# EAGLE board OSSI-1 COMMS Tshirts (EAGLE 6.5.0), part 1 of 2
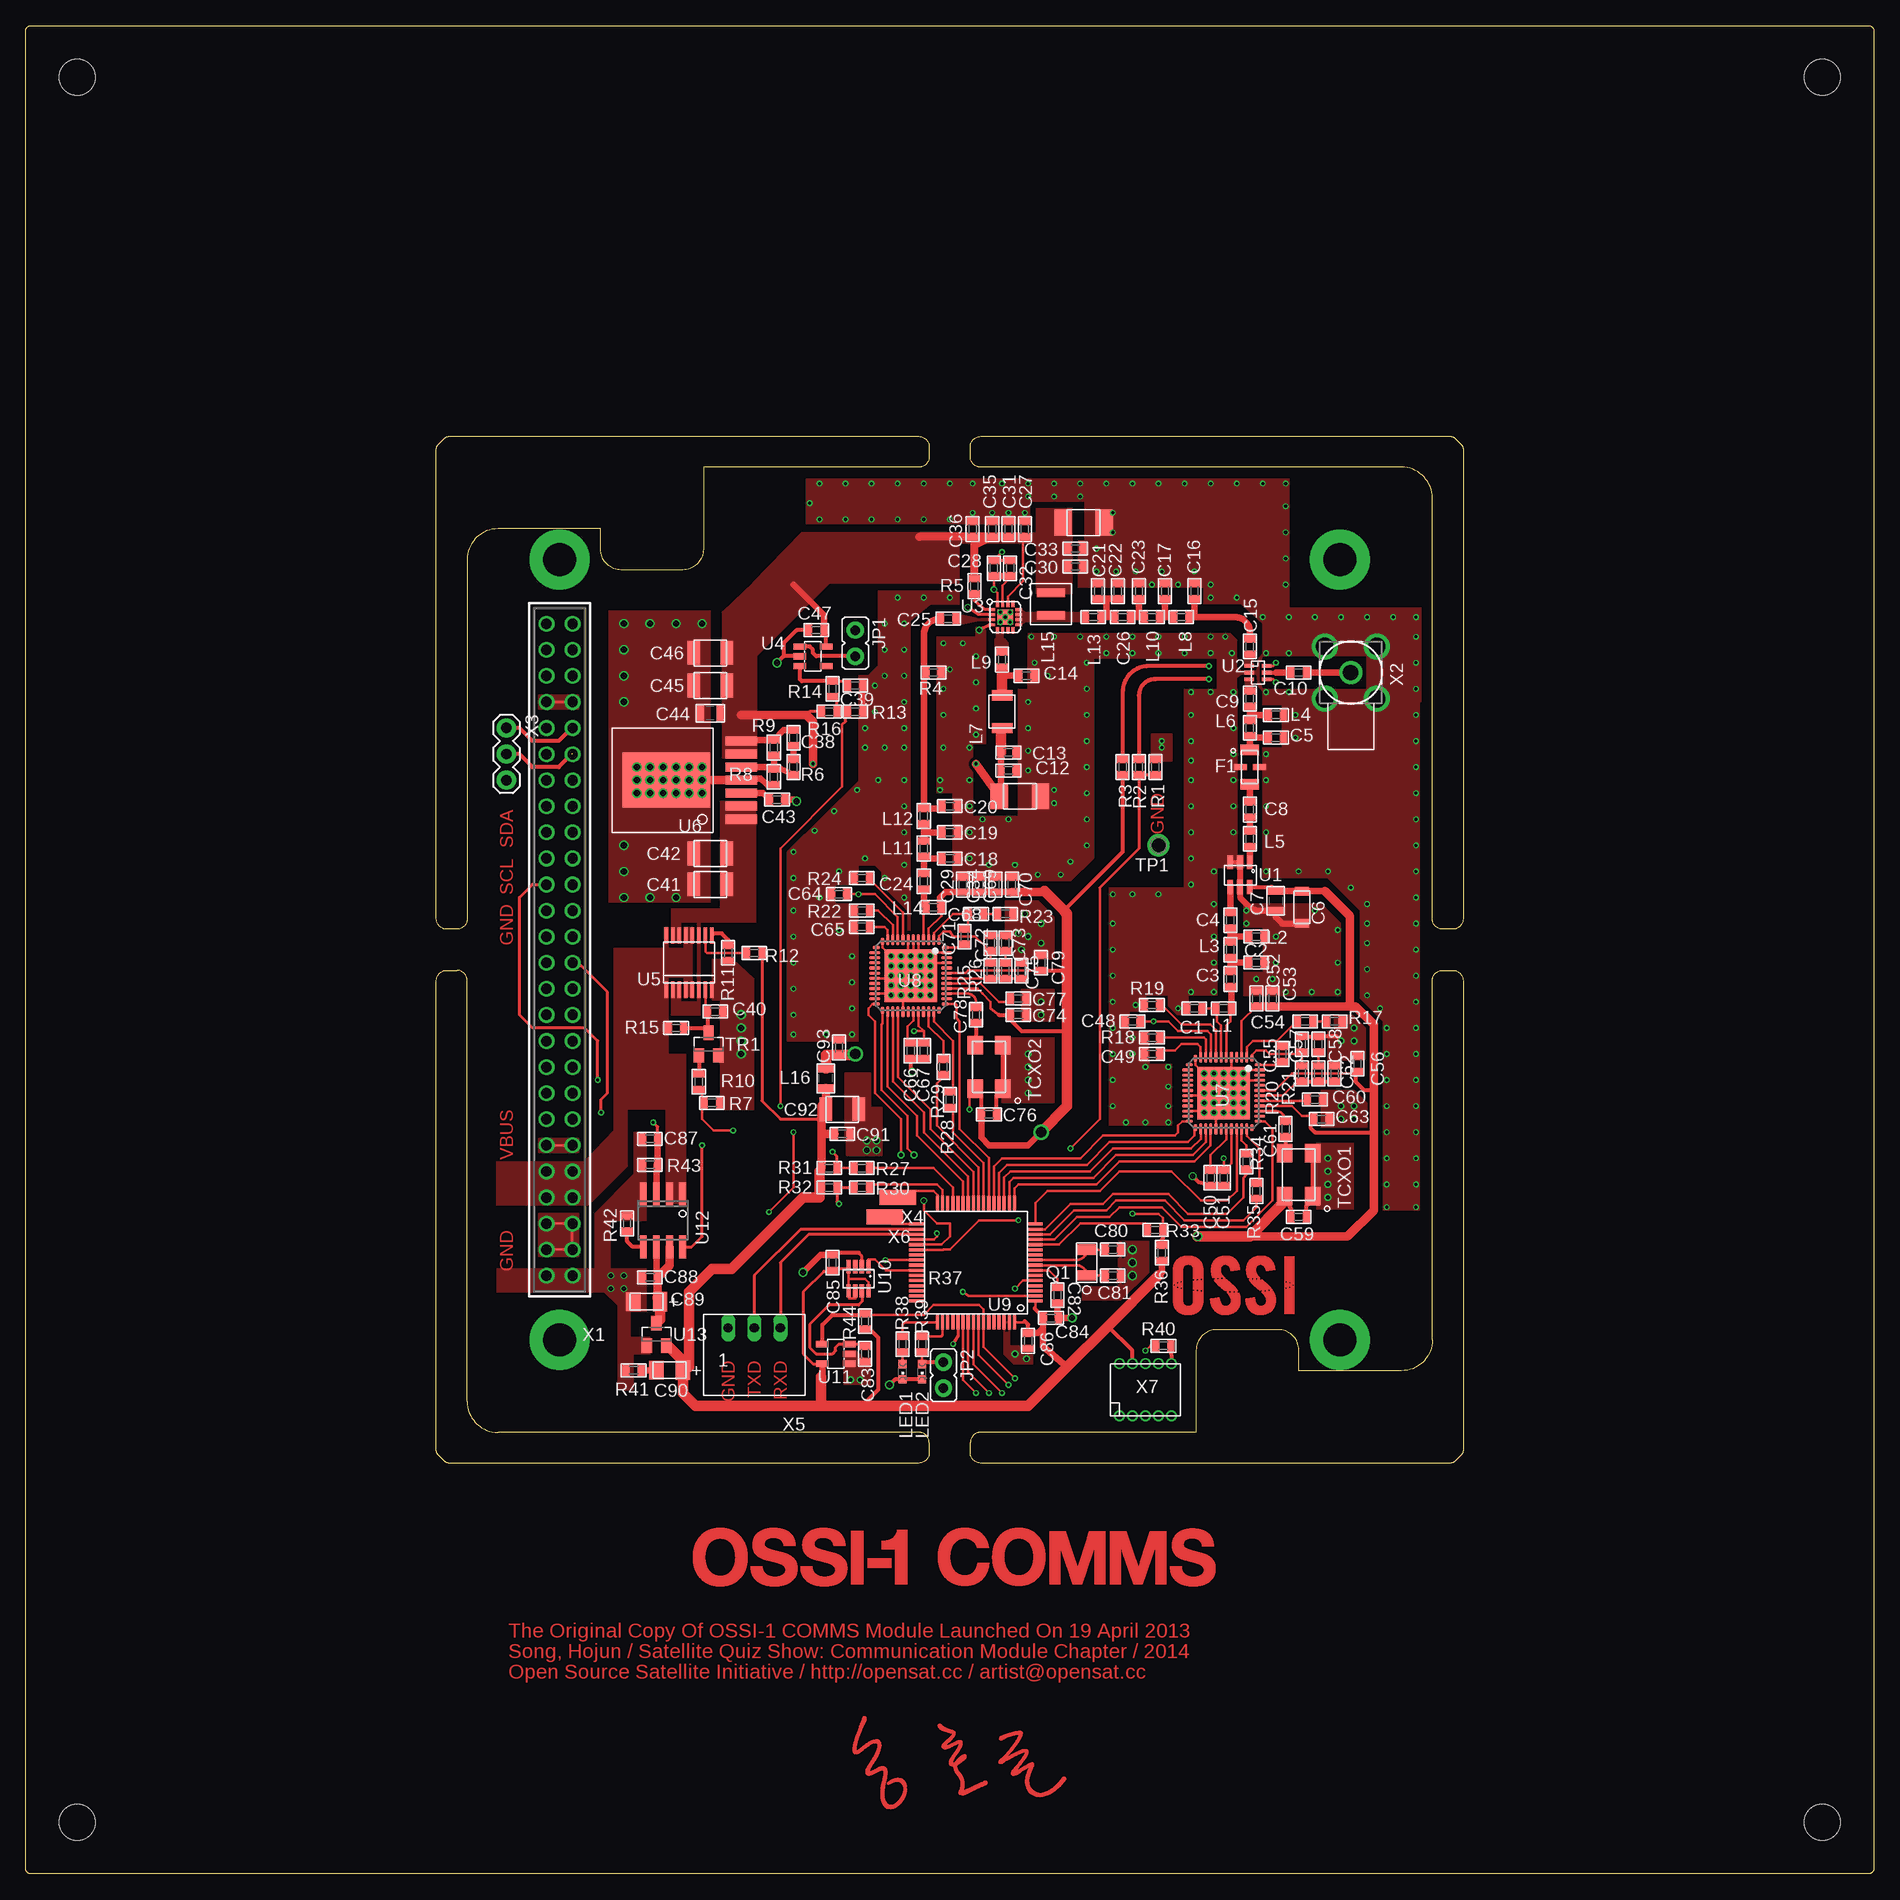
[diagram p0: board, top side]
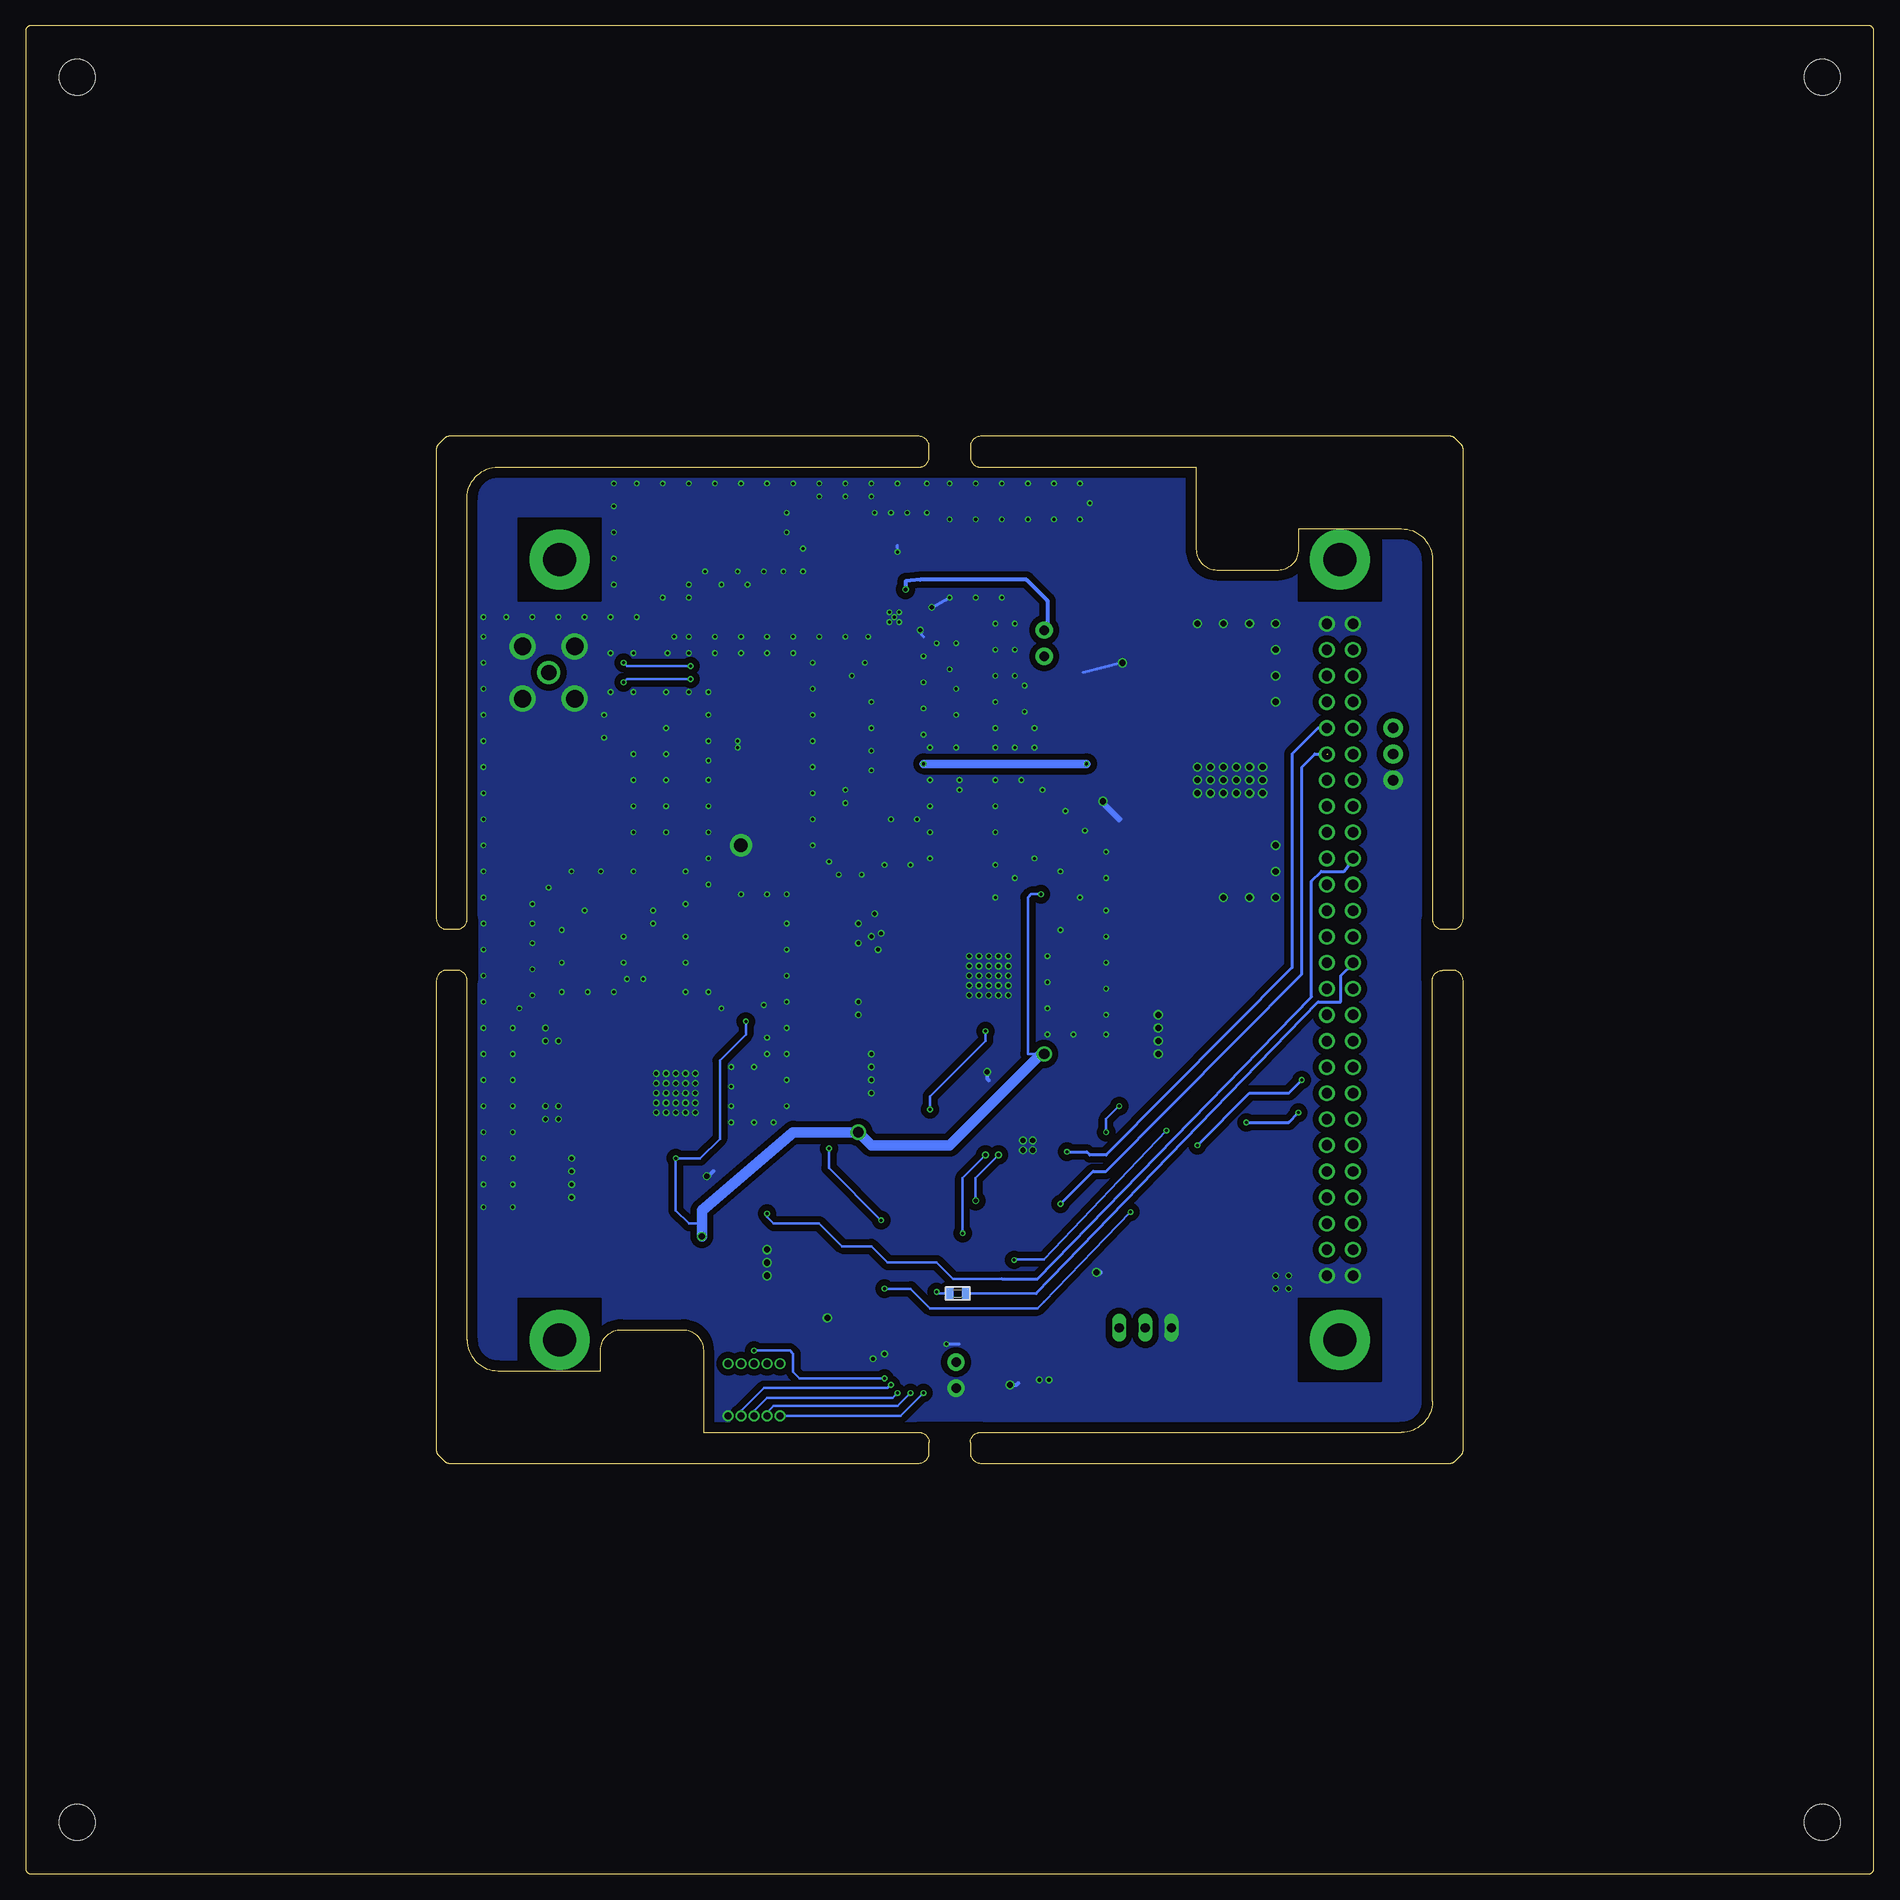
[diagram p1: board, bottom side, seen from below]

Size 180 x 180 mm. Coordinates in mm from the lower left corner, seen from the top.
Outline: 93,140 138.79,140 arc-45 139.15,139.85 139.85,139.15 arc-45 140,138.79 140,93 arc-90 139,92 138,92 arc-90 137,93 137,134 arc90 134,137 93,137 arc-90 92,138 92,139 arc-90 93,140
Outline: 137,52 137,87 arc-90 138,88 139,88 arc-90 140,87 140,41.21 arc-45 139.85,40.85 139.15,40.15 arc-45 138.79,40 93,40 arc-90 92,41 92,42 arc-90 93,43 114,43 114,51 arc-90 116,53 122,53 arc-90 124,51 124,49 134,49 arc90 137,52
Outline: 88,139 88,138 arc-90 87,137 66,137 66,129 arc-90 64,127 58,127 arc-90 56,129 56,131 46,131 arc90 43,128 43,93 arc-90 42,92 41,92 arc-90 40,93 40,138.79 arc-45 40.15,139.15 40.85,139.85 arc-45 41.21,140 87,140 arc-90 88,139
Outline: 43,46 43,87 arc90 42,88 41,88 arc90 40,87 40,41.21 arc45 40.15,40.85 40.85,40.15 arc45 41.21,40 87,40 arc90 88,41 88,42 arc90 87,43 46,43 arc-90 43,46
Outline: 179.5,0 0.5,0 arc-90 0,0.5 0,179.5 arc-90 0.5,180 179.5,180 arc-90 180,179.5 180,0.5 arc-90 179.5,0
Copper layers (1*16): Top 0.035mm / dielectric 1.5mm / Bottom 0.035mm
Design rules "default": minimum track width 10mil, minimum drill 5mil, track to track 8mil, track to pad 8mil, pad to pad 8mil, via to via 8mil, smd to smd 8mil, copper to edge 40mil, drill to drill 8mil, minimum pad ring 5mil, minimum via ring 5mil, stop-mask expansion 4mil, vias tented up to drill 0mil, thermal gap 10mil
Holes 3.5 mm at 5,175 175,175 175,5 5,5

## Footprints (pad centres in the part's own frame; a part is rotated, then mirrored left to right if it is on the bottom)
C0603(1608) = smd 0.7 x 1.1: 1 -0.75,0; 2 0.75,0
C1206-GCM31 = smd 0.8 x 1.4: P$1 -1.55,0; P$2 1.55,0
C0805(2012) = smd 0.7 x 1.5: 1 -0.95,0; 2 0.95,0
C1210-TMK325 = smd 1.7 x 2.5: P$1 -2,0; P$2 2,0
C1210-GCM32 = smd 1.2 x 2.3: P$1 -1.6,0; P$2 1.6,0
C1206(3216)-A = smd 1.4 x 1.9: 1 -1.3,0 | smd 1.4 x 1.8: 2 1.3,0
LFCN = smd 1.045 x 1.8: 1 -1.675,0; 3 1.675,0 | smd 0.61 x 1.25: 2 0,-0.925; 4 0,0.925
3.2-PAD-ROUND = drill 3.2 pad 5.842: B3,2 0,0
JP1 = drill 0.914 pad 1.676: 1 0,-1.27; 2 0,1.27
L0603(1608) = smd 0.7 x 1.1: 1 -0.75,0; 2 0.75,0
LQH32CN331K23L = smd 1 x 2: P$1 -1.6,0; P$2 1.6,0
NR3012 = smd 0.8 x 2.7: P$1 -1.1,0; P$2 1.1,0
L0805(2012) = smd 0.7 x 1.5: 1 -0.95,0; 2 0.95,0
CHIPLED_0603 = smd 0.8 x 0.8: A 0,-0.75; C 0,0.75
NX-3215 = smd 1 x 1.8: 1 -1.25,0; 2 1.25,0
R0603(1608) = smd 0.7 x 1.1: 1 -0.75,0; 2 0.75,0
TCXO_M532 = smd 1.8 x 1.5: 1 -2.1,-1.35; 2 2.1,-1.35; 3 2.1,1.35; 4 -2.1,1.35
TP-13 = drill 1.321 pad 2.159: TP 0,0
SOT23 = smd 1 x 1.4: 1 -0.95,-1.1; 2 0.95,-1.1; 3 0,1.1
SOT23-6 = smd 0.56 x 1.33: 1 -0.95,-1.2; 2 0,-1.2; 3 0.95,-1.2; 4 0.95,1.2; 5 0,1.2; 6 -0.95,1.2
SC70-6 = smd 0.36 x 0.95: 1 -0.65,-0.85; 2 0,-0.85; 3 0.65,-0.85; 4 0.65,0.85; 5 0,0.85; 6 -0.65,0.85
RF5110G = smd 0.64 x 0.28: 1 -1.3,0.75; 2 -1.3,0.25; 3 -1.3,-0.25; 4 -1.3,-0.75; 9 1.3,-0.75; 10 1.3,-0.25; 11 1.3,0.25; 12 1.3,0.75 | smd 0.28 x 0.64: 5 -0.75,-1.3; 6 -0.25,-1.3; 7 0.25,-1.3; 8 0.75,-1.3; 13 0.75,1.3; 14 0.25,1.3; 15 -0.25,1.3; 16 -0.75,1.3 | smd 1.5 x 1.5: TPAD 0,0
SOT23-5DBV = smd 0.6 x 1.22: 1 -0.95,-1.3; 2 0,-1.3; 3 0.95,-1.3; 4 0.95,1.3; 5 -0.95,1.3
16QSOP = smd 1.6 x 0.356: 1 -2.65,2.223; 2 -2.65,1.587; 3 -2.65,0.953; 4 -2.65,0.318; 5 -2.65,-0.318; 6 -2.65,-0.953; 7 -2.65,-1.587; 8 -2.65,-2.223; 9 2.65,-2.223; 10 2.65,-1.587; 11 2.65,-0.953; 12 2.65,-0.318; 13 2.65,0.318; 14 2.65,0.953; 15 2.65,1.587; 16 2.65,2.223
TO-PMOD-7 = smd 0.89 x 3.06: 1 -3.81,0; 2 -2.54,0; 3 -1.27,0; 4 0,0; 5 1.27,0; 6 2.54,0; 7 3.81,0 | smd 5.35 x 8.54: PAD 0,7.305
LFCSP48 = smd 0.7 x 0.32: 1 -3.375,2.75; 12 -3.375,-2.75; 25 3.375,-2.75; 36 3.375,2.75 | smd 1.1 x 0.32: 2 -3.5,2.25; 3 -3.5,1.75; 4 -3.5,1.25; 5 -3.5,0.75; 6 -3.5,0.25; 7 -3.5,-0.25; 8 -3.5,-0.75; 9 -3.5,-1.25; 10 -3.5,-1.75; 11 -3.5,-2.25; 26 3.5,-2.25; 27 3.5,-1.75; 28 3.5,-1.25; 29 3.5,-0.75; 30 3.5,-0.25; 31 3.5,0.25; 32 3.5,0.75; 33 3.5,1.25; 34 3.5,1.75; 35 3.5,2.25 | smd 0.32 x 0.7: 13 -2.75,-3.375; 24 2.75,-3.375; 37 2.75,3.375; 48 -2.75,3.375 | smd 0.32 x 1.1: 14 -2.25,-3.5; 15 -1.75,-3.5; 16 -1.25,-3.5; 17 -0.75,-3.5; 18 -0.25,-3.5; 19 0.25,-3.5; 20 0.75,-3.5; 21 1.25,-3.5; 22 1.75,-3.5; 23 2.25,-3.5; 38 2.25,3.5; 39 1.75,3.5; 40 1.25,3.5; 41 0.75,3.5; 42 0.25,3.5; 43 -0.25,3.5; 44 -0.75,3.5; 45 -1.25,3.5; 46 -1.75,3.5; 47 -2.25,3.5 | smd 5.1 x 5.1: EXP 0,0
PM/PAG64 = smd 1.4 x 0.3: 1 -5.8,3.75; 2 -5.8,3.25; 3 -5.8,2.75; 4 -5.8,2.25; 5 -5.8,1.75; 6 -5.8,1.25; 7 -5.8,0.75; 8 -5.8,0.25; 9 -5.8,-0.25; 10 -5.8,-0.75; 11 -5.8,-1.25; 12 -5.8,-1.75; 13 -5.8,-2.25; 14 -5.8,-2.75; 15 -5.8,-3.25; 16 -5.8,-3.75; 33 5.8,-3.75; 34 5.8,-3.25; 35 5.8,-2.75; 36 5.8,-2.25; 37 5.8,-1.75; 38 5.8,-1.25; 39 5.8,-0.75; 40 5.8,-0.25; 41 5.8,0.25; 42 5.8,0.75; 43 5.8,1.25; 44 5.8,1.75; 45 5.8,2.25; 46 5.8,2.75; 47 5.8,3.25; 48 5.8,3.75 | smd 0.3 x 1.4: 17 -3.75,-5.8; 18 -3.25,-5.8; 19 -2.75,-5.8; 20 -2.25,-5.8; 21 -1.75,-5.8; 22 -1.25,-5.8; 23 -0.75,-5.8; 24 -0.25,-5.8; 25 0.25,-5.8; 26 0.75,-5.8; 27 1.25,-5.8; 28 1.75,-5.8; 29 2.25,-5.8; 30 2.75,-5.8; 31 3.25,-5.8; 32 3.75,-5.8; 49 3.75,5.8; 50 3.25,5.8; 51 2.75,5.8; 52 2.25,5.8; 53 1.75,5.8; 54 1.25,5.8; 55 0.75,5.8; 56 0.25,5.8; 57 -0.25,5.8; 58 -0.75,5.8; 59 -1.25,5.8; 60 -1.75,5.8; 61 -2.25,5.8; 62 -2.75,5.8; 63 -3.25,5.8; 64 -3.75,5.8
SOT23-8 = smd 0.42 x 1.3: 1 -0.975,-1.175; 2 -0.325,-1.175; 3 0.325,-1.175; 4 0.975,-1.175; 5 0.975,1.175; 6 0.325,1.175; 7 -0.325,1.175; 8 -0.975,1.175
SO8 = smd 0.65 x 2.2: 1 -1.905,-2.6; 2 -0.635,-2.6; 3 0.635,-2.6; 4 1.905,-2.6; 5 1.905,2.6; 6 0.635,2.6; 7 -0.635,2.6; 8 -1.905,2.6
ESQ-126-XX-X-D = drill 1.016 pad 1.524: 1 -1.27,31.75; 2 1.27,31.75; 3 -1.27,29.21; 4 1.27,29.21; 5 -1.27,26.67; 6 1.27,26.67; 7 -1.27,24.13; 8 1.27,24.13; 9 -1.27,21.59; 10 1.27,21.59; 11 -1.27,19.05; 12 1.27,19.05; 13 -1.27,16.51; 14 1.27,16.51; 15 -1.27,13.97; 16 1.27,13.97; 17 -1.27,11.43; 18 1.27,11.43; 19 -1.27,8.89; 20 1.27,8.89; 21 -1.27,6.35; 22 1.27,6.35; 23 -1.27,3.81; 24 1.27,3.81; 25 -1.27,1.27; 26 1.27,1.27; 27 -1.27,-1.27; 28 1.27,-1.27; 29 -1.27,-3.81; 30 1.27,-3.81; 31 -1.27,-6.35; 32 1.27,-6.35; 33 -1.27,-8.89; 34 1.27,-8.89; 35 -1.27,-11.43; 36 1.27,-11.43; 37 -1.27,-13.97; 38 1.27,-13.97; 39 -1.27,-16.51; 40 1.27,-16.51; 41 -1.27,-19.05; 42 1.27,-19.05; 43 -1.27,-21.59; 44 1.27,-21.59; 45 -1.27,-24.13; 46 1.27,-24.13; 47 -1.27,-26.67; 48 1.27,-26.67; 49 -1.27,-29.21; 50 1.27,-29.21; 51 -1.27,-31.75; 52 1.27,-31.75
MCX-R/A = drill 1.5: 1 0,0 | drill 1.7: 2 -2.54,2.54; 3 2.54,2.54; 4 2.54,-2.54; 5 -2.54,-2.54
1X03 = drill 1.016 pad 1.88: 1 0,0; 2 2.54,0; 3 5.08,0
P-PAD-S = smd 3.556 x 1.5: 1 0,0
5268-03 = drill 0.9 long: 1 2.54,0; 2 0,0; 3 -2.54,0
M50-3200545 = drill 0.7 pad 1: 1 -2.54,-2.54; 2 -2.54,2.54; 3 -1.27,-2.54; 4 -1.27,2.54; 5 0,-2.54; 6 0,2.54; 7 1.27,-2.54; 8 1.27,2.54; 9 2.54,-2.54; 10 2.54,2.54

## Placement (x,y rotation side)
C1  6.8pF  [C0603(1608)]  113.82,84.3 180 top
C2  DNP  [C0603(1608)]  119.86,88.74 0 top
C3  13pF  [C0603(1608)]  117.31,87.15 90 top
C4  8.2pF  [C0603(1608)]  117.31,92.87 90 top
C5  DNP  [C0603(1608)]  121.76,110.65 0 top
C6  10uF  [C1206-GCM31]  124.3,94.14 270 top
C7  470pF 0805  [C0805(2012)]  121.76,94.77 270 top
C8  1000pF  [C0603(1608)]  119.22,103.66 90 top
C9  56pF  [C0603(1608)]  119.22,114.46 90 top
C10  56pF  [C0603(1608)]  123.98,117 180 top
C11  3.3uF  [C1210-TMK325]  96.84,104.93 0 top
C12  10pF  [C0603(1608)]  95.72,107.47 0 top
C13  1nF  [C0603(1608)]  95.72,109.22 0 top
C14  15pF  [C0603(1608)]  97.47,116.68 0 top
C15  56pF  [C0603(1608)]  119.22,119.54 90 top
C16  DNP  [C0603(1608)]  113.82,124.94 270 top
C17  DNP  [C0603(1608)]  110.97,124.94 270 top
C18  8.2pF  [C0603(1608)]  90.01,98.9 0 top
C19  12pF  [C0603(1608)]  90.01,101.44 0 top
C20  8.2pF  [C0603(1608)]  90.01,103.98 0 top
C21  10pF  [C0603(1608)]  104.46,124.94 90 top
C22  6pF  [C0603(1608)]  106.36,124.94 90 top
C23  DNP  [C0603(1608)]  108.42,124.94 270 top
C24  6pF  [C0603(1608)]  87.47,96.68 90 top
C25  56pF  [C0603(1608)]  89.85,122.24 0 top
C26  56pF  [C0603(1608)]  106.84,122.39 0 top
C27  330pF  [C0603(1608)]  97.31,130.97 90 top
C28  10nF  [C0603(1608)]  94.3,127.16 270 top
C29  100pF  [C0603(1608)]  91.28,96.36 90 top
C30  47pF  [C0603(1608)]  102.23,127.32 0 top
C31  1nF  [C0603(1608)]  95.72,130.97 90 top
C32  10nF  [C0603(1608)]  95.88,127.16 270 top
C33  1nF  [C0603(1608)]  102.23,129.06 0 top
C34  100nF  [C0603(1608)]  92.87,96.36 90 top
C35  10nF  [C0603(1608)]  94.14,130.97 90 top
C36  10nF  [C0603(1608)]  92.23,130.97 270 top
C37  3.3uF  [C1210-TMK325]  103.03,131.6 0 top
C38  180pF  [C0603(1608)]  74.77,110.65 270 top
C39  100nF  [C0603(1608)]  80.8,115.73 0 top
C40  100nF  [C0603(1608)]  67.15,83.98 0 top
C41  4.7uF  [C1210-GCM32]  66.67,96.36 180 top
C42  22uF,1210  [C1210-GCM32]  66.67,99.38 180 top
C43  10nF  [C0603(1608)]  73.18,104.61 0 top
C44  4.7uF,1210  [C0805(2012)]  66.67,113.03 180 top
C45  22uF  [C1210-GCM32]  66.67,115.73 180 top
C46  100uF  [C1210-GCM32]  66.67,118.9 180 top
C47  100nF  [C0603(1608)]  76.99,121.12 180 top
C48  100nF  [C0603(1608)]  107.79,83.03 180 top
C49  100nF  [C0603(1608)]  109.69,79.85 180 top
C50  100nF  [C0603(1608)]  115.41,67.78 270 top
C51  10nF  [C0603(1608)]  116.68,67.78 270 top
C52  100nF  [C0603(1608)]  119.86,85.25 90 top
C53  100pF  [C0603(1608)]  121.44,85.25 90 top
C54  100nF  [C0603(1608)]  124.62,83.03 0 top
C55  22nF  [C0603(1608)]  122.39,79.85 90 top
C56  10nF  [C0603(1608)]  129.7,78.9 90 top
C57  1.2nF  [C0603(1608)]  124.3,80.8 90 top
C58  100nF  [C0603(1608)]  125.89,80.8 90 top
C59  10nF  [C0603(1608)]  123.98,63.98 0 top
C60  100nF  [C0603(1608)]  125.57,75.41 0 top
C61  22pF  [C0603(1608)]  122.71,72.55 90 top
C62  10nF  [C0603(1608)]  127.47,77.94 90 top
C63  10nF  [C0603(1608)]  126.2,73.5 0 top
C64  100nF  [C0603(1608)]  79.22,95.41 180 top
C65  100nF  [C0603(1608)]  81.44,92.23 180 top
C66  100nF  [C0603(1608)]  86.2,80.17 270 top
C67  10nF  [C0603(1608)]  87.47,80.17 270 top
C68  100nF  [C0603(1608)]  92.55,93.5 0 top
C69  100nF  [C0603(1608)]  94.45,96.36 90 top
C70  100pF  [C0603(1608)]  96.04,96.36 90 top
C71  22nF  [C0603(1608)]  91.44,91.28 90 top
C72  1.2nF  [C0603(1608)]  93.98,90.65 90 top
C73  100nF  [C0603(1608)]  95.41,90.65 90 top
C74  10nF  [C0603(1608)]  96.68,83.66 0 top
C75  10nF  [C0603(1608)]  97,87.95 90 top
C76  10nF  [C0603(1608)]  93.82,73.98 0 top
C77  100nF  [C0603(1608)]  96.68,85.25 0 top
C78  22pF  [C0603(1608)]  92.55,83.66 90 top
C79  10nF  [C0603(1608)]  98.9,88.74 90 top
C80  12.5pF  [C0603(1608)]  105.89,60.8 0 top
C81  12.5pF  [C0603(1608)]  105.89,58.26 0 top
C82  100nF  [C0603(1608)]  100.49,56.36 270 top
C83  100nF  [C0603(1608)]  81.75,50.64 270 top
C84  100nF  [C0603(1608)]  99.85,54.13 0 top
C85  100nF  [C0603(1608)]  78.58,59.53 90 top
C86  100nF  [C0603(1608)]  97.63,51.91 270 top
C87  1uF  [C0603(1608)]  60.8,71.59 180 top
C88  100nF  [C0603(1608)]  60.8,58.1 180 top
C89  10uF, LDO Tantal 16V  [C1206(3216)-A]  60.48,55.72 180 top
C90  10uF, LDO Tantal 16V  [C1206(3216)-A]  62.7,49.05 180 top
C91  10nF  [C0603(1608)]  79.53,72.07 0 top
C92  22uF,1210  [C1210-GCM32]  79.53,74.45 0 top
C93  100nF  [C0603(1608)]  79.22,80.48 90 top
E$1  [OSSI-1COMMSQUIZLOGO]  65,28 0 top
E$2  [HOJUNSIGN]  79,6 0 top
F1  LFCN-530  [LFCN]  119.22,107.79 270 top
H1  MOUNT-PAD-ROUND3.2  [3.2-PAD-ROUND]  52,52 180 top
H2  MOUNT-PAD-ROUND3.2  [3.2-PAD-ROUND]  52,128 180 top
H3  MOUNT-PAD-ROUND3.2  [3.2-PAD-ROUND]  128,52 180 top
H4  MOUNT-PAD-ROUND3.2  [3.2-PAD-ROUND]  128,128 180 top
JP1  [JP1]  80.8,119.86 180 top
JP2  [JP1]  89.39,48.56 180 top
L1  27nH  [L0603(1608)]  116.68,84.3 0 top
L2  DNP  [L0603(1608)]  119.86,91.28 0 top
L3  0R  [L0603(1608)]  117.31,90.01 90 top
L4  DNP  [L0603(1608)]  121.76,112.87 0 top
L5  39nH  [L0603(1608)]  119.22,100.81 90 top
L6  0R  [L0603(1608)]  119.22,111.6 90 top
L7  0R  [LQH32CN331K23L]  95.09,113.19 90 top
L8  0R  [L0603(1608)]  112.55,122.39 0 top
L9  1.5nH  [L0603(1608)]  95.09,118.27 90 top
L10  0R  [L0603(1608)]  109.69,122.39 0 top
L11  11nH  [L0603(1608)]  87.47,99.85 90 top
L12  11nH  [L0603(1608)]  87.47,103.03 90 top
L13  3.9nH  [L0603(1608)]  103.98,122.39 0 top
L14  27nH  [L0603(1608)]  88.42,94.14 0 top
L15  39nH 3012, 1A rating  [NR3012]  99.85,123.67 90 top
L16  7R, 3A, Ferrite bead  [L0805(2012)]  77.94,77.47 90 top
LED1  [CHIPLED_0603]  85.41,48.89 180 top
LED2  [CHIPLED_0603]  87.31,48.89 180 top
Q1  NX-3215  [NX-3215]  103.34,59.53 90 top
R1  100k  [R0603(1608)]  110.01,107.79 270 top
R2  1.5k  [R0603(1608)]  108.42,107.79 90 top
R3  1.5k  [R0603(1608)]  106.84,107.79 270 top
R4  180  [R0603(1608)]  88.42,117 180 top
R5  11nH  [R0603(1608)]  92.39,125.41 90 top
R6  4.12k  [R0603(1608)]  74.77,107.79 270 top
R7  470k  [R0603(1608)]  66.83,75.09 0 top
R8  15.968k  [R0603(1608)]  72.87,106.84 270 top
R9  49.9k  [R0603(1608)]  72.87,109.69 270 top
R10  1.5k  [R0603(1608)]  65.56,77.15 270 top
R11  750R  [R0603(1608)]  68.42,89.69 90 top
R12  100k  [R0603(1608)]  70.96,89.69 180 top
R13  100k  [R0603(1608)]  80.8,113.19 0 top
R14  1.5k  [R0603(1608)]  78.58,115.41 90 top
R15  100k  [R0603(1608)]  63.34,82.39 180 top
R16  22k  [R0603(1608)]  78.26,113.19 0 top
R17  3.9  [R0603(1608)]  127.47,83.03 180 top
R18  3.6k  [R0603(1608)]  109.69,81.44 180 top
R19  1.1k  [R0603(1608)]  109.69,84.61 180 top
R20  280  [R0603(1608)]  124.3,77.94 270 top
R21  100  [R0603(1608)]  125.89,77.94 270 top
R22  3.6k  [R0603(1608)]  81.44,93.82 0 top
R23  3.9  [R0603(1608)]  95.41,93.5 180 top
R24  1.1k  [R0603(1608)]  81.44,97 0 top
R25  280  [R0603(1608)]  93.98,87.95 270 top
R26  100  [R0603(1608)]  95.41,87.95 270 top
R27  250  [R0603(1608)]  81.44,68.74 0 top
R28  4.7k  [R0603(1608)]  90.01,75.41 90 top
R29  4.7k  [R0603(1608)]  89.38,78.58 90 top
R30  250  [R0603(1608)]  81.44,66.83 0 top
R31  10k  [R0603(1608)]  78.26,68.74 180 top
R32  10k  [R0603(1608)]  78.26,66.83 180 top
R33  4.7k  [R0603(1608)]  110.01,62.7 0 top
R34  4.7k  [R0603(1608)]  118.9,69.37 90 top
R35  4.7k  [R0603(1608)]  119.86,66.52 90 top
R36  470k  [R0603(1608)]  110.65,60.48 270 top
R37  1.5k  [R0603(1608)]  89.22,56.51 0 bottom
R38  1k  [R0603(1608)]  85.41,51.59 270 top
R39  1k  [R0603(1608)]  87.31,51.59 270 top
R40  4.7k  [R0603(1608)]  110.81,51.43 180 top
R41  0  [R0603(1608)]  59.21,49.05 180 top
R42  6.2k  [R0603(1608)]  58.58,63.34 270 top
R43  100k  [R0603(1608)]  60.8,69.06 0 top
R44  100k  [R0603(1608)]  81.75,53.81 270 top
TCXO1  19.2MHz  [TCXO_M532]  123.98,68.1 90 top
TCXO2  19.2MHz  [TCXO_M532]  93.82,78.58 90 top
TP1  TP  [TP-13]  110.33,100.17 180 top
TR1  FDV301N  [SOT23]  66.52,80.8 0 top
U1  MAX2640  [SOT23-6]  118.27,97.31 180 top
U2  PE4259  [SC70-6]  120.01,117 270 top
U3  RF5110G  [RF5110G]  95.41,122.39 0 top
U4  OPA347  [SOT23-5DBV]  76.67,118.58 270 top
U5  MAX869L  [16QSOP]  64.61,88.74 90 top
U6  LMZ10503EXT  [TO-PMOD-7]  69.69,106.52 90 top
U7  ADF7021-N  [LFCSP48]  116.68,76.04 270 top
U8  ADF7021-N  [LFCSP48]  86.2,87.47 270 top
U9  MSP430F1611  [PM/PAG64]  92.55,59.53 180 top
U10  MAX6369  [SOT23-8]  81.12,57.94 180 top
U11  TPS3838  [SOT23-5DBV]  78.9,50.64 90 top
U12  MAX890L  [SO8]  62.07,63.66 180 top
U13  MCP1700_SOT23  [SOT23]  61.44,52.55 0 top
U$1  OSSILOGORECT  [OSSILOGORECT1005]  111.76,54.45 0 top
X1  ESQ-126-38-G-D  [ESQ-126-XX-X-D]  52,90 180 top
X2  RFCON-MCX-R/A  [MCX-R/A]  129.06,117 270 top
X3  [1X03]  46.83,111.6 270 top
X4  P-PAD-S  [P-PAD-S]  84.93,65.88 180 top
X5  5268-03  [5268-03]  70.96,53.18 180 top
X6  P-PAD-S  [P-PAD-S]  83.66,63.98 180 top
X7  JTAG10PINMINI-H  [M50-3200545]  109.06,47.15 0 top

## Library data of the parts
C1-C93 F1 H1-H4 JP1 JP2 L1-L16 Q1 R1-R44 TCXO1 TCXO2 TP1 TR1 U1-U13 U$1 X1-X7 = OSSI
E$1 E$2 = OSSI-1QuizShowCOMMS
LED1 LED2 = led

## Nets
3.3VCOMMS: C84.1 C85.1 C86.1 C90.1 C91.1 C92.P$1 L16.1 R12.1 R31.2 R32.2 R36.2 R44.2 U9.1 U9.64 U10.4 U10.5 U10.6 U10.8 U11.5 U13.2 X7.4
3.3VOBC: X1.45 X1.46
/RST: R40.2 R44.1 U9.58 U11.4
ANT_DEPLOY1: X1.19
ANT_DEPLOY2: X1.20
BAT_-CHRG: X1.42
BAT_-FAULT: X1.44
BAT_-ON: X1.38
BAT_TEMP: X1.47
BEACON_-FAULT: X1.30
BEACON_OFF: X1.24
BEACON_SCL: X1.37
BEACON_SDA: X1.39
BUS_CS: X1.27
COMMS_-FAULT: U12.8 X1.32
COMMS_-RST: C83.1 U10.7 U11.3
COMMS_OFF: C87.1 R43.2 U12.3 X1.25
COMMS_SCL: R30.1 R32.1 X1.41 X3.2
COMMS_SDA: R27.1 R31.1 X1.43 X3.1
COMMSRX_CE: U7.24 U9.21
COMMSRX_CLK: R35.2 U7.35
COMMSRX_CLKOUT: U7.36
COMMSRX_CPOUT: C62.1 R20.2 R21.2 U7.42
COMMSRX_DATA: R34.2 U7.34
COMMSRX_MUXOUT: U7.37 U9.13
COMMSRX_RFIN: C3.1 L1.2 U7.6
COMMSRX_RFINB: C1.1 L1.1 U7.7
COMMSRX_SCLK: U7.28 U9.17
COMMSRX_SDATA: U7.26 U9.19
COMMSRX_SLE: U7.25 U9.20
COMMSRX_SREAD: U7.27 U9.18
COMMSRX_SWD: U7.33 U9.16
COMMSRX_TCXO: C61.2 U7.39
COMMSRX_VCOIN: C57.1 R20.1 U7.1
COMMSTX_CE: U8.24 U9.37
COMMSTX_CLK: R28.2 U8.35
COMMSTX_CLKOUT: U8.36
COMMSTX_CPOUT: C75.1 R25.2 R26.2 U8.42
COMMSTX_DATA: R29.2 U8.34
COMMSTX_MUXOUT: U8.37 U9.22
COMMSTX_RFOUT: C24.1 L14.1 U8.4
COMMSTX_SCLK: U8.28 U9.25
COMMSTX_SDATA: U8.26 U9.27
COMMSTX_SLE: U8.25 U9.36
COMMSTX_SREAD: U8.27 U9.26
COMMSTX_TCXO: C78.2 U8.39
COMMSTX_VCOIN: C72.1 R25.1 U8.1
GND: C1.2 C2.2 C5.2 C6.P$2 C7.2 C11.P$2 C12.2 C13.2 C14.2 C16.1 C17.1 C18.2 C19.2 C20.2 C21.2 C22.2 C23.1 C27.2 C28.1 C29.2 C30.2 C31.2 C32.1 C33.2 C34.2 C35.2 C36.1 C37.P$2 C39.2 C40.2 C41.P$2 C42.P$2 C43.2 C44.2 C45.P$2 C46.P$2 C47.2 C48.2 C49.2 C50.2 C51.2 C52.2 C53.2 C56.2 C57.2 C58.2 C59.2 C60.2 C62.2 C63.2 C64.2 C65.2 C66.2 C67.2 C69.2 C70.2 C72.2 C73.2 C74.2 C75.2 C76.2 C77.2 C79.2 C80.2 C81.2 C82.2 C83.2 C84.2 C85.2 C86.2 C87.2 C88.2 C89.2 C91.2 C92.P$2 C93.2 F1.2 F1.4 JP2.2 L2.2 L4.2 LED1.C LED2.C R1.1 R4.1 R7.2 R8.2 R11.1 R13.2 R17.1 R18.2 R19.2 R22.1 R23.1 R24.1 R41.2 R42.1 R43.1 TCXO1.1 TCXO1.2 TCXO2.1 TCXO2.2 TP1.TP TR1.2 U1.2 U1.3 U1.5 U2.2 U3.2 U3.4 U3.TPAD U4.2 U5.8 U6.4 U6.PAD U7.5 U7.12 U7.19 U7.22 U7.29 U7.45 U7.47 U7.EXP U8.5 U8.6 U8.7 U8.12 U8.19 U8.22 U8.29 U8.45 U8.47 U8.EXP U9.53 U9.62 U9.63 U10.2 U11.1 U11.2 U12.4 U13.1 X1.1 X1.2 X1.51 X1.52 X2.2 X2.3 X2.4 X2.5 X3.3 X5.1 X7.9
LED1: R39.1 U9.50
LED_-FAULT: X1.28
LED_OFF: X1.23
LED_SCL: X1.33
LED_SDA: X1.35
N$1: C60.1 U7.41
N$2: R40.1 X7.10
N$3: C65.1 U8.11
N$4: C23.2 C26.2 L10.1
N$5: C81.1 Q1.1 U9.8
N$6: C80.1 Q1.2 U9.9
N$7: L5.1 U1.1
N$8: C8.1 L5.2
N$9: C50.1 U7.31
N$10: C49.1 U7.11
N$11: C88.1 C89.1 U12.6 U12.7 U13.3
N$12: R42.2 U12.5
N$13: C82.1 U9.7
N$14: C4.2 U1.4
N$15: C5.1 F1.1 L6.1
N$16: C8.2 F1.3
N$17: U9.57 X7.7
N$18: U9.56 X7.5
N$19: U9.55 X7.3
N$20: U9.54 X7.1
N$21: C9.1 L4.1 L6.2
N$22: C55.1 U7.48
N$23: C17.2 L8.1 L10.2
N$24: R19.1 U7.8
N$25: R18.1 U7.10
N$26: C54.2 R17.2
N$27: C71.1 U8.48
N$28: R22.2 U8.10
N$29: C68.2 R23.2
N$30: R24.2 U8.8
N$31: C77.1 U8.41
N$32: C66.1 U8.31
N$33: C20.1 C25.1 L12.2 R4.2
N$34: C68.1 C71.2 U8.2
N$35: C54.1 C55.2 U7.2
N$36: C18.1 C24.2 L11.1
N$37: C19.1 L11.2 L12.1
N$38: C73.1 R26.1
N$39: C15.2 C16.2 L8.2
N$40: C58.1 R21.1
N$41: C10.2 U2.5
N$42: R2.2 U2.4
N$43: C4.1 L2.1 L3.2
N$44: R3.1 U2.6
N$45: LED1.A R38.2
N$46: C10.1 X2.1
N$47: C40.1 R15.1 TR1.3 U5.7
N$48: R38.1 U9.49
N$49: JP2.1 LED2.A R39.2
N$50: C43.1 U6.3
N$51: R10.1 TR1.1
N$52: C41.P$1 C42.P$1 U5.2 U5.3 U5.6 U5.11 U5.14 U5.15 U6.1 U6.2
N$53: R6.2 R8.1 R9.2 U6.5
N$54: C38.2 R6.1
N$55: R11.2 U5.9
N$56: U9.35 X5.3
N$57: U9.34 X5.2
N$58: C15.1 U2.1
N$59: C9.2 U2.3
N$60: R27.2 U9.29
N$61: R30.2 U9.31
N$62: C2.1 C3.2 L3.1
N$63: R34.1 U9.15
N$64: R35.1 U9.14
N$65: R28.1 U9.23
N$66: C61.1 TCXO1.3
N$67: R29.1 U9.24
N$68: C78.1 TCXO2.3
N$69: U9.42 U10.1
N$70: C39.1 R14.2 U4.3
N$71: C21.1 C22.1 C26.1 L13.2
N$72: L9.2 U3.5 U3.6
N$73: C25.2 U3.3
N$74: C90.2 R41.1
N$75: L13.1 L15.P$1 U3.9 U3.10 U3.11 U3.12
N$76: JP1.2 U4.1
N$77: U9.33 X6.1
N$78: U9.32 X4.1
N$79: C14.1 L7.P$2 L9.1
N$80: R5.1 U3.1
OBC_-FAULT: R33.2 R36.1 X1.34
OBC_-FAULT_IN: R33.1 U9.12
OBC_OFF: R37.2 X1.26
OBC_OFF_OUT: R37.1 U9.2
PA_-FAULT: R12.2 U5.10
PA_BIAS: R13.1 R14.1 R16.2 U9.5
PA_ON: R7.1 R10.2 U9.40
PANELTEMP_SCL: X1.29
PANELTEMP_SDA: X1.31
RX_ON: U9.39
SC_-ON: X1.40
SC_-PFO: X1.48
SCCHG_EN: X1.21
SCOUT_-PG: X1.50
SCOUT_EN: X1.22
SOLAR_-ON: X1.36
SOLAR_CS1: X1.15
SOLAR_CS2: X1.14
SOLAR_CS3: X1.17
SOLAR_CS4: X1.16
SOLAR_CS5: X1.18
STRUT_GND: H4.B3,2
SUPERCAP_TEMP: X1.49
TX_ON: R1.2 R2.1 U9.38
VAPC: C28.2 C32.2 JP1.1 U3.15 U3.16
VBAT: X1.11 X1.12
VBUS: R15.2 U5.1 U5.4 U5.5 U5.12 U5.13 U5.16 U12.1 U12.2 X1.7 X1.8 X1.9 X1.10
VCCRF: C6.P$1 C7.1 C29.1 C34.1 C48.1 C51.1 C52.1 C53.1 C56.1 C59.1 C63.1 C64.1 C67.1 C69.1 C70.1 C74.1 C76.1 C79.1 C93.1 L14.2 L16.2 R3.2 TCXO1.4 TCXO2.4 U1.6 U7.3 U7.9 U7.32 U7.40 U7.43 U8.3 U8.9 U8.32 U8.40 U8.43
VCOMMS_PA: C11.P$1 C12.1 C13.1 C27.1 C30.1 C31.1 C33.1 C35.1 C36.2 C37.P$1 C38.1 C44.1 C45.P$1 C46.P$1 C47.1 L7.P$1 L15.P$2 R5.2 R9.1 R16.1 U3.14 U4.5 U6.6 U6.7
VSOLAR: X1.3 X1.4 X1.5 X1.6
VSUPERCAP: X1.13

## Tracks (layer width: path | path; a pad name or v marks a point on that pad's centre or on a via)
3.3VCOMMS
  Top 0.254: R32.2 77.51,66.95 77.31,67.15 | R31.2 77.51,68.62 77.31,68.42 | U9.1 98.35,55.17 98.27,55.09 | U9.64 97.23,53.73 97.31,53.81 | U10.6 80.8,56.05 80.8,56.04 80.17,56.04 80.17,56.75 U10.5 80.15,57.94 | U10.4 80.15,57.94 | U10.8 82.09,57.6 81.75,57.94 80.15,57.94 | 78.6,58.8 78.54,58.86
  Top 0.305: R12.1 71.71,75.29 73.5,73.5 77.15,73.5 | U11.5 76.67,49.69 75.72,50.64 75.72,56.67 77.74,58.69 78.38,58.69 78.54,58.86 78.58,58.89 | U10.4 80.07,59.12 79.85,58.89 78.69,58.89 78.6,58.8 C85.1
  Top 0.406: C84.1 99.1,54.25 98.27,55.09 | C86.1 97.63,53.5 97.31,53.81 | X7.4 107.79,50.96 105.41,53.34 | R44.2 82.19,53.06 83.03,52.23 83.03,47.15 82.07,46.2 82.07,45.56 | 77.15,73.5 77.51,73.5
  Top 0.61: C84.1 99.1,53.18 | 99.1,53.18 99.1,51.39 101.44,49.37 | C86.1 98.58,52.66 99.1,53.18 | R36.2 110.65,58.58 110.33,58.26 | U11.5 77.6,48.55 77.47,48.42
  Top 0.813: R31.2 77.51,71.91 | 77.51,71.91 77.51,73.5 77.51,74.77 | C92.P$1 77.51,74.77 | C91.1 77.67,72.07 77.51,71.91 | L16.1 77.94,75.2 77.51,74.77
  Top 1.016: 77.47,45.56 65.25,45.56 64,46.8 C90.1 64,49.08 64.29,49.37 64.61,49.37 | 77.47,45.56 82.07,45.56 97.63,45.56 101.44,49.37 105.41,53.34 110.33,58.26 | 77.31,68.42 77.31,67.15 77.31,65.88 75.72,65.88 68.74,58.89 66.83,58.89 64.61,56.67 64.61,49.37 | 77.47,45.56 77.47,48.42 | U13.2 62.53,51.45 64.61,49.37
3.3VOBC
  Top 0.254: X1.45 53.18,114.14 50.64,114.14 X1.46
  pour Top (no thermals): 53.81,113.5 53.81,114.78 50.01,114.78 50.01,113.5
/RST  (via drill 0.3)
  Top 0.254: v96.36,48.26 93.3,51.32 U9.58 93.3,54.97 92.87,55.4 88.42,55.4 87.47,54.45 81.96,54.45 | R40.2 109.54,51.43 v109.06,50.96 | 81.75,54.45 R44.1
  Top 0.406: U11.4 77.6,53.47 78.58,54.45 81.75,54.45 81.96,54.45 R44.1
  Bottom 0.254: v96.36,48.26 104.61,48.26 105.25,48.89 105.25,50.64 105.57,50.96 v109.06,50.96
COMMS_-FAULT  (via drill 0.3)
  Top 0.305: U12.8 64.87,61.06 65.88,62.07 v65.88,70.96 | v55.72,77.31 55.72,81.12 54.45,82.39 49.37,82.39 48.1,83.66 48.1,95.09 49.37,96.36 X1.32
  Bottom 0.305: v65.88,70.96 60.8,76.04 56.99,76.04 v55.72,77.31
COMMS_-RST
  Top 0.305: U10.7 81.44,55.73 81.12,55.4 78.26,55.4 76.36,53.5 76.36,51.27 76.99,50.64 78.58,50.64 78.9,50.96 78.9,51.27 79.22,51.59 U11.3 81.56,51.59 C83.1
COMMS_OFF  (via drill 0.3)
  Top 0.254: 61.44,69.06 R43.2
  Top 0.305: C87.1 61.55,72.75 v61.12,73.18 | v56.04,74.13 56.04,75.41 56.67,76.04 56.67,85.88 54.13,88.42 53.5,88.42 53.19,88.73 | X1.25 53.19,88.73 | 53.19,88.73 53.18,88.74
  Top 0.61: U12.3 61.44,69.06 | R43.2 C87.1
  Bottom 0.305: v61.12,73.18 56.99,73.18 v56.04,74.13
COMMS_SCL  (via drill 0.3)  (1 unrouted)
  Top 0.305: v79.22,65.25 79.01,65.45 R32.1 R30.1
  Top 0.406: X3.2 48.1,109.06 49.37,107.79 51.91,107.79 53.18,109.06
  Bottom 0.305: v79.22,65.25 76.04,68.42 74.77,68.42 55.72,87.63 55.72,107.79 54.45,109.06 X1.41
COMMS_SDA  (via drill 0.3)
  Top 0.254: R27.1 R31.1
  Top 0.305: R31.1 79.01,69.89 v78.58,70.33
  Top 0.406: X1.43 53.17,111.59 51.91,110.33 49.37,110.33 48.1,111.6 X3.1
  Bottom 0.305: v78.58,70.33 76.67,70.33 76.36,70.01 74.77,70.01 56.67,88.26 56.67,109.06 54.14,111.59 X1.43
COMMSRX_CE
  Top 0.254: U9.21 94.3,68.9 95.09,69.69 102.71,69.69 104.93,71.91 111.92,71.91 112.23,72.23 112.23,72.87 112.66,73.29 U7.24
COMMSRX_CLK
  Top 0.254: U7.35 118.93,71.89 120.17,70.64 120.17,67.58 R35.2
COMMSRX_CPOUT
  Top 0.254: R20.2 123.87,77.19 122.46,75.79 U7.42
  Top 0.406: R20.2 R21.2 C62.1
COMMSRX_DATA
  Top 0.254: U7.34 118.43,71.43 118.9,70.96 R34.2
COMMSRX_MUXOUT
  Top 0.254: U7.37 120.7,73.29 121.44,72.55 121.44,65.56 118.9,63.02 112.55,63.02 110.65,64.93 106.52,64.93 105.57,63.98 102.39,63.98 100.2,61.78 U9.13
COMMSRX_RFIN
  Top 0.254: U7.6 116.93,82.64 117.31,83.03 117.31,84.18 L1.2
  Top 0.406: 117.43,86.29 C3.1
  Top 0.61: L1.2 117.43,86.29
COMMSRX_RFINB
  Top 0.254: U7.7 116.43,82.64 116.05,83.03 116.05,84.18 L1.1 C1.1
COMMSRX_SCLK
  Top 0.254: U9.17 96.3,66.78 96.68,67.15 104.3,67.15 106.52,69.37 113.82,69.37 115.41,70.96 115.41,72.55 115.42,72.54 U7.28
COMMSRX_SDATA
  Top 0.254: U9.19 95.3,67.83 95.89,68.42 103.66,68.42 105.89,70.64 113.5,70.64 114.46,71.59 114.46,72.51 U7.26
COMMSRX_SLE
  Top 0.254: U9.20 94.8,68.28 95.57,69.06 103.34,69.06 105.57,71.28 113.19,71.28 113.82,71.91 113.81,72.55 U7.25
COMMSRX_SREAD
  Top 0.254: U7.27 114.93,71.27 113.67,70.01 106.2,70.01 103.98,67.78 96.2,67.78 95.8,67.39 U9.18
COMMSRX_SWD
  Top 0.254: U9.16 98.35,65.33 99.53,66.52 104.61,66.52 106.52,68.42 111.6,68.42 114.46,65.56 117,65.56 117.95,66.52 117.95,72.55 117.94,72.54 U7.33
COMMSRX_TCXO
  Top 0.254: U7.39 121.72,74.29 arc-90 C61.2
COMMSRX_VCOIN
  Top 0.254: R20.1 C57.1 124.1,79.85 121.12,79.85 120.81,80.17 119.86,80.17 119.43,79.74 U7.1
COMMSTX_CE  (via drill 0.4)
  Top 0.254: v85.25,70.01 85.25,73.5 82.71,76.04 82.71,83.03 82.07,83.66 82.07,84.3 82.5,84.72 U8.24 | U9.37 89.22,61.28 90.01,62.07 90.01,63.34 88.74,63.34 87.47,64.61 v87.47,65.56
  Bottom 0.254: v87.47,65.56 87.47,67.78 v85.25,70.01
COMMSTX_CLK
  Top 0.254: U8.35 88.45,83 90.33,81.12 90.33,76.47 R28.2
COMMSTX_CPOUT
  Top 0.254: C75.1 R26.2 R25.2 89.72,87.2 U8.42
COMMSTX_DATA
  Top 0.254: U8.34 87.95,82.55 89.38,81.12 R29.2 89.38,79.22
COMMSTX_MUXOUT
  Top 0.254: U9.22 93.8,69.71 90.96,72.55 90.96,83.02 90.65,83.34 90.65,84.61 90.54,84.72 U8.37
COMMSTX_RFOUT
  Top 0.254: U8.4 87.45,93.91 L14.1
  Top 0.406: 87.47,94.34 L14.1
  Top 0.61: C24.1 87.47,94.34
COMMSTX_SCLK
  Top 0.254: U8.28 84.95,77.61 88.1,74.45 88.1,72.55 92.3,68.35 U9.25
COMMSTX_SDATA
  Top 0.254: U8.26 83.95,76.7 86.84,73.82 86.84,71.91 91.3,67.45 U9.27
COMMSTX_SLE  (via drill 0.3, 0.4)
  Top 0.254: U9.36 88.45,61.78 88.74,62.07 v88.74,62.39 | v86.52,70.01 85.88,70.64 85.88,73.82 83.34,76.36 83.34,82.72 83.45,82.83 U8.25
  Bottom 0.254: v88.74,62.39 88.74,67.78 v86.52,70.01
COMMSTX_SREAD
  Top 0.254: U8.27 84.45,77.16 87.47,74.13 87.47,72.23 91.8,67.9 U9.26
COMMSTX_TCXO
  Top 0.254: U8.39 91.76,85.72 arc-90 92.55,84.93 C78.2
COMMSTX_VCOIN
  Top 0.254: R25.1 C72.1 92.44,91.28 90.33,91.28 90.02,91.75 89.38,91.75 88.95,91.33 U8.1
GND  (via drill 0.3, 0.4, 0.5, 0.6)
  Top 0.254: U8.47 88.45,89.72 v87.15,88.42 87.45,88.72 U8.45 86.22,88.72 85.95,88.99 U8.7 | U8.5 86.95,89.58 v87.15,89.38 | U8.6 86.45,89.62 v86.2,89.38 | v86.2,88.42 U8.EXP | U8.12 83.45,90.22 v84.3,89.38 | U8.22 84.45,85.72 v85.25,86.52 | U8.19 85,87.22 v85.25,87.47 | U8.29 85.45,85.36 v85.25,85.56 | U7.47 118.93,78.29 v117.63,76.99 117.93,77.29 U7.45 | U7.5 117.43,78.15 v117.63,77.94 | U7.12 113.93,78.79 v114.78,77.94 | U7.22 114.93,74.29 v115.73,75.09 115.93,74.88 U7.29 | U7.19 115.48,75.79 v115.73,76.04 | C72.2 95.2,91.4 95.41,91.6 C73.2 95.41,91.28 | C58.2 125.57,81.55
  Top 0.28: U3.2 92.88,122.64
  Top 0.305: U3.4 93.97,121.64 arc45 93.79,121.57 v92.87,121.12 | 92.88,122.64 arc-45 92.7,122.72 v91.76,123.35 | U9.53 90.8,52.38 v90.33,51.59 | C32.1 94.34,127.91 94.45,128.11 | 94.45,128.11 94.3,127.95 C28.1 | 94.45,128.11 v95.09,128.75 | U10.2 81.44,60.16 81.12,60.48
  Top 0.406: C59.2 124.73,65.04 125.33,65.64 | TCXO1.1 125.33,65.64 | 125.33,65.64 125.57,65.88 125.33,66.12 TCXO1.2 | U1.2 U1.3 | C57.2 125.57,81.55 125.84,81.55 125.89,81.6 127.63,81.6 v128.11,81.12 | C51.2 C50.2 114.25,67.35 v113.66,67.94 | C67.2 C66.2 86.2,78.26 v86.36,78.1 | C39.2 R13.2 | C76.2 94.57,75.88 TCXO2.1 TCXO2.2 | C47.2 75.09,121.12 73.82,119.86 73.82,118.58 | U4.2 73.82,118.58 | 73.82,118.58 v73.18,117.95 | LED2.C LED1.C 84.66,48.14 v84.14,47.62 | 81.12,60.48 78.78,60.48 C85.2
  Top 0.6: U1.2 U1.5 118.27,95.09 119.22,94.14 119.86,93.82 C7.2 121.76,93.19 122.39,92.55 124.26,92.55 C6.P$2
  Top 0.61: R8.2 72.19,106.09 71.59,106.68 69.85,106.68 U6.4 | C43.2 74.93,104.61 v75.09,104.46 | v101.92,54.13 C84.2 100.49,54.25 C82.2 | C85.2 77.42,60.28 v75.72,58.58
  Top 0.813: U6.4 v65.88,106.52 v63.34,106.52
  Bottom 0.305: v92.87,121.12 92.81,121.12 arc45 92.79,120.73 92.55,120.49 | v91.76,123.35 v90.01,124.3 | v73.18,117.95 76.99,117 | v90.33,51.59 89.06,51.59 | v95.09,128.75 95.09,129.38
  Bottom 0.406: v113.66,67.94 113.5,67.94 113.03,68.42 | v86.36,78.1 86.36,77.47 86.2,77.31 | v84.14,47.62 83.5,47.62 83.34,47.78
  Bottom 0.61: v75.09,104.46 75.09,104.3 73.5,102.71 | v75.72,58.58 75.41,58.58
  other vias: 116.68,76.04 116.68,75.09 116.68,74.13 117.63,74.13 117.63,75.09 117.63,76.04 116.68,76.99 115.73,76.99 115.73,74.13 116.68,77.94 115.73,77.94 118.58,76.99 118.58,76.04 118.58,75.09 118.58,74.13 114.78,74.13 114.78,75.09 114.78,76.04 114.78,76.99 118.58,77.94 86.2,87.47 86.2,86.52 86.2,85.56 85.25,88.42 85.25,89.38 84.3,88.42 84.3,87.47 84.3,86.52 87.15,85.56 87.15,86.52 87.15,87.47 88.1,89.38 88.1,88.42 88.1,87.47 88.1,86.52 88.1,85.56 65.88,105.25 64.61,106.52 65.88,107.79 64.61,107.79 63.34,107.79 63.34,105.25 64.61,105.25 62.07,105.25 62.07,106.52 62.07,107.79 60.8,107.79 60.8,106.52 60.8,105.25 59.53,105.25 59.53,106.52 59.53,107.79 84.3,85.56 129.38,81.12 129.38,82.39 129.38,74.77 129.38,73.5 128.11,73.5 128.11,74.77 126.84,69.69 126.84,68.42 126.84,67.15 126.84,65.88 96.36,50.64 97.47,50.16 80.33,48.1 107.79,60.8 107.79,58.26 107.79,59.53 82.87,70.48 81.91,70.48 69.69,79.85 69.69,81.12 69.69,82.39 69.69,83.66 95.41,122.39 94.93,121.92 95.88,121.92 95.88,122.87 94.93,122.87 80.48,81.75 80.48,84.3 80.48,86.84 80.48,89.38 79.22,91.91 77.31,95.09 79.22,97.63 81.75,98.9 83.66,97 85.56,95.09 85.56,98.27 85.56,101.44 85.56,103.98 85.56,106.52 83.66,109.69 85.56,111.6 85.56,114.14 85.56,116.68 85.56,119.22 85.56,121.76 87.47,124.3 84.93,124.3 83.66,121.76 83.66,116.68 82.71,115.73 81.75,109.69 83.03,106.52 80.96,105.57 78.74,103.5 76.83,101.6 74.77,99.53 74.77,97 74.77,93.82 74.77,91.28 74.77,88.74 74.77,86.2 74.77,83.66 74.77,81.75 77.94,81.75 101.76,98.58 100.81,97.31 98.58,97.31 96.36,98.27 93.82,98.27 91.91,98.9 91.91,101.44 91.91,103.98 103.34,100.17 103.34,102.71 103.34,105.25 103.34,107.79 103.34,110.33 103.34,112.87 103.34,115.41 103.34,117.95 105.25,118.9 107.79,118.9 110.33,118.9 112.87,118.9 115.41,118.9 117.47,118.9 116.84,120.49 115.41,120.49 112.87,120.49 110.33,120.49 107.79,120.49 105.25,120.49 102.71,120.49 100.17,120.49 97.95,120.49 98.27,117.95 97.63,114.14 97.63,109.38 97.63,107.47 100.17,105.57 100.17,104.3 95.72,102.71 89.06,105.57 91.91,106.52 92.55,110.97 92.55,113.5 92.55,116.05 92.55,118.58 91.28,119.86 89.38,119.86 89.38,112.87 89.38,115.41 89.38,109.69 91.91,109.69 89.06,106.52 99.53,116.68 90.01,117.31 123.03,118.9 120.49,122.39 115.41,124.3 115.41,125.57 113.82,126.84 112.23,125.57 110.65,126.84 109.69,125.57 108.11,126.84 106.2,126.84 104.3,126.84 104.3,129.06 105.89,130.65 105.89,132.56 97.31,132.56 95.72,132.56 94.14,132.56 92.23,132.56 102.71,134.14 100.17,134.14 97.63,134.14 90.01,131.92 84.93,135.41 87.47,131.92 84.93,131.92 82.39,131.92 79.85,131.92 77.31,131.92 76.36,133.51 77.31,135.41 79.85,135.41 82.39,135.41 87.47,135.41 90.01,135.41 92.23,135.41 95.09,135.41 97.63,135.41 100.17,135.41 102.71,135.41 105.25,135.41 107.79,135.41 110.33,135.41 112.87,135.41 115.41,135.41 117.95,135.41 120.49,135.41 122.71,135.41 122.71,133.19 122.71,130.65 122.71,128.11 122.71,125.57 123.03,122.39 125.57,122.39 128.11,122.39 130.65,122.39 133.19,122.39 135.41,122.39 135.41,120.49 135.41,117.95 135.41,115.41 135.41,112.87 135.41,110.33 135.41,107.79 135.41,105.25 135.41,102.71 135.41,100.17 135.41,97.63 135.41,95.09 135.41,92.55 135.41,90.01 135.41,87.47 135.41,84.93 135.41,82.39 135.41,79.85 135.41,77.31 135.41,74.77 135.41,72.23 135.41,69.69 135.41,67.15 135.41,64.93 132.56,64.93 132.56,67.15 132.56,69.69 132.56,72.23 132.56,74.77 132.56,77.31 132.56,79.85 130.65,85.56 130.65,88.1 130.65,90.65 130.65,92.55 130.65,94.45 129.06,96.04 132.56,82.39 131.92,84.3 126.84,97.63 123.98,97.63 120.81,97.63 120.81,101.44 120.81,103.98 120.81,106.52 120.81,109.06 123.67,110.65 123.67,112.87 120.81,115.09 123.03,115.09 127.79,85.88 127.79,88.74 127.79,91.91 125.57,93.82 118.9,93.82 121.44,87.15 119.86,87.15 122.71,85.88 125.25,85.88 115.73,85.88 115.73,88.74 115.73,91.28 115.73,94.45 115.73,97.63 117.63,101.44 117.63,103.98 117.63,106.52 117.63,109.06 117.63,111.6 117.63,115.09 115.41,115.09 113.5,115.09 113.5,112.87 113.5,110.33 113.5,108.42 113.5,106.52 113.5,103.98 113.5,101.44 113.5,98.9 113.5,96.36 110.33,95.41 107.79,95.41 105.89,95.41 105.89,92.55 105.89,90.01 105.89,87.47 105.89,84.93 105.89,82.39 105.89,79.85 105.89,77.31 105.89,74.77 107.16,73.18 111.28,73.18 109.06,73.18 111.28,74.77 111.28,76.67 111.28,78.58 109.06,78.58 107.79,79.85 107.79,81.44 108.11,84.61 112.23,84.3 113.5,85.88 97.63,76.04 97.63,77.31 97.63,78.58 97.63,79.85 98.9,83.66 98.9,84.93 98.9,90.65 97,90.01 96.68,91.6 97.31,93.5 98.9,92.55 97.63,91.28 85.56,109.69 81.75,111.6 82.71,113.19 93.19,102.71 120.81,118.9 117.95,124.3 121.76,88.74 121.76,91.28 118.9,92.55 81.28,48.1 58.26,58.26 58.26,56.99 56.99,58.26 56.99,56.99 82.87,71.44 81.91,71.44 97.63,111.6 83.66,119.22 110.65,110.33 110.65,109.69 65.88,121.76 63.34,121.76 60.8,121.76 58.26,121.76 58.26,119.22 58.26,116.68 58.26,114.14 58.26,95.09 58.26,97.63 58.26,100.17 60.8,95.09 63.34,95.09
  pour Bottom (isolate 0.61, no thermals): 137,48.1 124.3,48.1 124.3,53.18 114.14,53.18 114.14,43.02 43.02,43.02 43.02,130.65 55.72,130.65 55.72,126.84 65.88,126.84 65.88,137 137,137
  pour Top (no thermals): 60.48,72.23 59.21,72.23 59.21,68.1 55.4,64.29 55.4,58.89 45.88,58.89 45.88,56.67 56.36,56.67 57.62,55.4 57.62,47.15 59.21,47.15 59.21,50.64 60.8,50.64 60.8,52.23 58.89,52.23 58.89,54.77 60.48,54.77 60.48,58.89 56.99,58.89 56.99,63.66 60.48,63.66
  pour Top (no thermals): 66.67,123.03 66.67,94.61 56.83,94.61 56.83,123.03
  pour Top (no thermals): 130.33,79.22 128.11,79.22 128.11,78.42 126.84,78.42 126.84,82.07 127.47,82.07 127.47,83.66 129.22,83.66 130.49,82.39 130.49,79.37
  pour Top (no thermals): 130.65,72.71 126.2,72.71 126.2,76.36 129.38,76.36 130.65,75.09
  pour Top (no thermals): 125.73,71.12 125.73,64.77 129.38,64.77 129.38,71.12
  pour Top: 98.11,49.69 98.11,51.43 95.88,51.43 95.88,54.45 95.25,54.45 95.25,50.64 96.2,49.69
  pour Top (no thermals): 79.69,50.96 80.8,50.96 82.23,49.69 82.23,47.62 79.69,47.62
  pour Top: 106.36,61.59 106.36,57.15 102.87,57.15 102.87,55.88 106.68,55.88 109.38,58.58 109.38,61.59
  pour Top (no thermals): 79.85,77.94 79.85,71.59 80.01,71.59 80.01,70.01 83.34,70.01 83.34,74.61 82.23,74.61 82.23,77.94
  pour Top (no thermals): 68.9,89.06 66.83,89.06 66.83,85.09 67.63,85.09 67.63,74.45 70.96,74.45 70.96,87.15
  pour Top (no thermals): 116.05,97.95 116.05,85.56 113.19,85.56 113.19,83.66 111.28,83.66 111.28,85.56 109.06,85.56 109.06,83.98 107.47,83.98 107.47,82.07 109.38,82.07 109.38,78.9 111.6,78.9 111.6,72.87 105.57,72.87 105.57,96.04 112.87,96.04 112.87,115.41 117.95,115.41 117.95,99.22 118.58,99.22 118.58,97.95
  pour Top (no thermals): 132.24,64.61 132.24,83.03 130.01,85.25 130.01,93.82 126.84,97 120.49,97 120.49,109.69 122.39,109.69 122.39,113.82 120.49,113.82 120.49,115.41 120.81,115.41 120.81,115.41 135.73,115.41 135.73,64.61
  pour Top (no thermals): 97.79,131.44 76.04,131.44 76.04,135.89 123.03,135.89 123.03,121.76 120.49,121.76 118.43,123.67 114.78,123.67 114.78,125.25 102.55,125.25 102.55,129.86 103.19,129.86 103.19,133.67 97.79,133.67
  pour Top (no thermals): 81.12,81.12 81.12,94.45 78.9,94.45 78.9,96.36 81.12,96.36 81.12,98.27 82.71,98.27 83.34,97.63 83.34,96.36 85.88,93.82 85.88,91.91 86.2,91.91 86.2,122.08 88.1,123.67 90.96,123.67 90.96,124.94 83.03,124.94 83.03,117.63 82.07,116.68 81.12,116.68 81.12,106.36 74.13,99.53 74.13,81.12
  pour Top (isolate 0.305, no thermals): 103.98,98.9 101.76,96.68 90.33,96.68 90.33,105.25 88.74,105.25 88.74,120.49 92.55,120.49 92.55,121.44 93.19,121.44 93.5,121.12 93.5,110.01 92.23,110.01 92.23,103.03 96.68,103.03 96.68,115.41 97.63,115.41 97.63,120.49 103.98,120.49
  pour Top (no thermals): 95.09,75.09 95.09,81.44 100.17,81.44 100.17,75.09
  pour Top (no thermals): 97,83.03 97,86.2 100.17,86.2 100.17,83.03
  pour Top (no thermals): 100.17,89.06 97.63,89.06 97.63,88.42 96.36,88.42 96.36,90.96 95.41,90.96 95.41,94.77 98.58,94.77 100.17,93.19
  pour Top (no thermals): 137,114.14 130.65,114.14 130.65,118.58 120.49,118.58 120.49,123.35 137,123.35
  pour Top (no thermals): 120.81,115.41 120.49,115.41 120.17,116.2 120.17,117.79 120.49,118.58 120.81,118.58 120.81,119.22 120.01,118.27 119.86,117.16 118.43,117.16 117.95,117.47 117.95,120.17 117.31,120.81 97.63,120.81 97.63,119.22 98.27,118.43 116.05,118.43 116.05,114.62 117.95,114.62 117.95,116.52 118.43,116.84 119.86,116.84 120.01,115.73 120.65,114.93 120.81,114.93
  pour Top (no thermals): 128.11,85.56 128.11,92.55 126.2,94.45 118.58,94.45 118.58,92.23 120.49,92.23 120.49,87.79 118.58,87.79 118.58,85.56
  pour Top (no thermals): 109.69,108.42 109.69,110.97 111.6,110.97 111.6,108.42
LED1
  Top 0.254: R39.1 89.17,52.34 89.3,52.47 U9.50
N$1
  Top 0.254: U7.41 124.82,75.29 124.94,75.41 C60.1
N$2
  Top 0.406: R40.1 X7.10
N$3
  Top 0.254: U8.11 83.95,91.94 83.66,92.23 C65.1
N$4
  Top 0.61: L10.1 108.42,122.39 | 108.42,122.39 C26.2 | C23.2 108.42,122.39
N$5
  Top 0.254: U9.8 102.34,59.28 arc-90 Q1.1 105.11,58.28 C81.1
N$6
  Top 0.254: U9.9 102.34,59.78 arc90 Q1.2 105.11,60.78 C80.1
N$7
  Top 0.406: U1.1
  Top 0.61: L5.1 U1.1
N$8
  Top 0.61: C8.1 L5.2
N$9
  Top 0.254: U7.31 116.93,71.53 115.41,70.01 C50.1
N$10
  Top 0.254: U7.11 114.43,80.51 114.14,80.8 112.55,80.8 111.92,80.17 110.76,80.17 C49.1
N$11
  Top 0.61: U12.6 61.44,58.22 C88.1
  Top 0.813: 61.55,56.08 C88.1 62.7,59.26 U12.7
  Top 1.016: U13.3 61.78,53.99 C89.1 61.78,55.85 61.55,56.08
N$12
  Top 0.406: U12.5 59.11,61.06 58.58,61.59 R42.2 58.58,62.7
N$13
  Top 0.254: U9.7 99.65,58.78 100.49,57.94 C82.1
N$14
  Top 0.406: U1.4
  Top 0.61: C4.2 U1.4
N$15
  Top 0.61: F1.1 119.22,110.65 | C5.1 119.22,110.65 | L6.1 119.22,110.65
N$16
  Top 0.61: C8.2 F1.3
N$17  (via drill 0.3)
  Top 0.254: v95.72,47.62 92.8,50.55 U9.57
  Bottom 0.254: X7.7 110.33,45.08 108.11,47.31 96.04,47.31 v95.72,47.62
N$18  (via drill 0.3)
  Top 0.254: v95.09,46.83 92.3,49.62 U9.56
  Bottom 0.254: X7.5 109.06,45.08 107.79,46.35 95.57,46.35 v95.09,46.83
N$19  (via drill 0.3)
  Top 0.254: U9.55 91.76,53.69 91.76,48.86 91.84,48.77 91.88,48.77 v93.82,46.83
  Bottom 0.254: X7.3 107.79,44.92 107.16,45.56 95.09,45.56 v93.82,46.83
N$20  (via drill 0.3)
  Top 0.254: v92.55,46.83 91.28,48.1 91.3,50.66 U9.54
  Bottom 0.254: X7.1 94.77,44.61 v92.55,46.83
N$21
  Top 0.61: L6.2 119.22,112.87 | 119.22,112.87 C9.1 | L4.1 119.22,112.87
N$22
  Top 0.254: U7.48 122.08,78.79 C55.1
N$23
  Top 0.61: L10.2 110.97,122.39 | 110.97,122.39 L8.1 | C17.2 110.97,122.39
N$24
  Top 0.254: U7.8 115.93,82.19 115.41,82.71 112.55,82.71 110.65,84.61 R19.1
N$25
  Top 0.254: U7.10 114.93,81.28 114.78,81.44 R18.1
N$26
  Top 0.254: C54.2 R17.2
N$27
  Top 0.254: U8.48 90.54,90.22 91.48,90.21 | C71.1 91.48,90.21 | 91.48,90.21 91.6,90.33
N$28
  Top 0.254: U8.10 84.45,92.4 83.03,93.82 R22.2
N$29
  Top 0.254: C68.2 R23.2
N$30
  Top 0.254: U8.8 85.45,93.62 82.07,97 R24.2
N$31
  Top 0.254: U8.41 92.98,86.72 94.77,84.93 95.61,84.93 C77.1
N$32
  Top 0.254: U8.31 86.45,83.12 85.88,82.55 85.88,81.23 C66.1
N$33
  Top 0.254: 89.06,122.24 C25.1
  Top 0.305: R4.2 87.67,117.11 arc90 87.63,117.16 87.63,120.49 arc90 87.47,120.65
  Top 0.61: 89.06,122.24 arc90 87.47,120.65 L12.2 89.06,103.78 C20.1
N$34
  Top 0.254: U8.2 88.45,91.62 90.33,93.5 C68.1 91.8,92.3 C71.2
N$35
  Top 0.254: U7.2 118.93,80.51 119.54,81.12 121.88,81.12 | 121.88,81.12 C55.2 | C54.1 123.78,83.03 121.88,81.12
N$36
  Top 0.406: 87.67,98.9 L11.1
  Top 0.61: L11.1 C24.2 | C18.1 87.67,98.9
N$37
  Top 0.61: L12.1 87.47,101.44 | C19.1 87.47,101.44 | L11.2 87.47,101.44
N$38
  Top 0.254: R26.1 C73.1
N$39
  Top 0.254: C15.2 119.2,120.2 119.22,120.49
  Top 0.61: 113.82,122.39 117.79,122.39 arc-90 119.22,120.97 119.22,120.49 119.22,120.33 | 113.82,122.39 L8.2 | C16.2 113.82,122.39
N$40
  Top 0.254: C58.1 R21.1
N$41
  Top 0.406: U2.5 121.76,117
  Top 0.61: C10.2 121.76,117
N$42  (via drill 0.3)
  Top 0.254: U2.4 121.46,116.35 v121.76,116.05
  Top 0.406: v115.25,116.36 110.01,116.36 arc90 108.42,114.78 R2.2
  Bottom 0.254: v121.76,116.05 121.44,116.36 v115.25,116.36
N$43
  Top 0.61: L3.2 117.31,91.28 | 117.31,91.28 C4.1 | L2.1 117.31,91.28
N$44  (via drill 0.3)
  Top 0.254: U2.6 121.46,117.65 v121.76,117.95
  Top 0.406: v115.25,117.63 109.38,117.63 arc90 106.84,115.09 R3.1
  Bottom 0.254: v121.76,117.95 121.44,117.63 v115.25,117.63
N$45
  Top 0.254: R38.2 LED1.A
  cutout Bottom (no thermals): 132,49 132,56 124,56 124,49
  cutout Bottom (no thermals): 56,124 56,131 48,131 48,124
  cutout Bottom (no thermals): 132,124 132,132 124,132 124,124
  cutout Bottom (no thermals): 56,48 56,56 48,56 48,48
  cutout Bottom (no thermals): 93,136 93,140 87,140 87,136
  cutout Bottom (no thermals): 44,93 40,93 40,87 44,87
  cutout Bottom (no thermals): 140,93 136,93 136,87 140,87
  cutout Bottom (no thermals): 93,40 93,44 87,44 87,40
N$46
  Top 0.61: C10.1 X2.1
N$47
  Top 0.254: U5.7 66.2,84.18 C40.1
  Top 0.406: C40.1 66.4,82.39 | 66.4,82.39 66.4,82.02 TR1.3 | R15.1 66.4,82.39
N$48
  Top 0.254: U9.49 85.64,53.73 85.41,53.5 R38.1
N$49
  Top 0.254: R39.2 LED2.A
  Top 0.406: JP2.1 87.62,49.84 87.43,49.64 LED2.A
N$50
  Top 0.61: U6.3 71.8,105.25 C43.1
N$51
  Top 0.406: TR1.1 65.56,79.1 R10.1
N$52
  pour Top (no thermals): 62.86,90.65 63.82,90.65 63.82,92.71 65.4,92.71 65.4,84.93 63.82,84.93 63.82,86.68 62.86,86.68 62.86,83.66 65.72,83.66 65.72,92.71 71.12,92.71 71.12,104.46 67.63,104.46 67.63,93.98 62.86,93.98
N$53
  Top 0.61: R9.2 R8.1 | U6.5 72.66,107.79 R8.1 | R8.1 73.59,107.59 R6.2
N$54
  Top 0.61: C38.2 R6.1
N$55
  Top 0.406: R11.2 68.42,90.96 67.78,91.6 67.04,91.6 U5.9
N$56
  Top 0.305: U9.35 76.25,62.28 73.5,59.53 X5.3
N$57
  Top 0.305: U9.34 75.48,62.78 70.96,58.26 X5.2
N$58
  pour Top (no thermals): 119.54,117.63 118.74,117.63 118.74,119.06 119.54,119.06
N$59
  pour Top (no thermals): 119.54,114.93 119.54,116.36 118.74,116.36 118.74,114.93
N$60
  Top 0.254: U9.29 90.3,66.86 88.42,68.74 R27.2
N$61
  Top 0.254: U9.31 89.3,66.59 88.74,67.15 82.5,67.15 R30.2
N$62
  Top 0.61: C3.2 117.31,88.74 | 117.31,88.74 L3.1 | C2.1 117.31,88.74
N$63
  Top 0.254: R34.1 118.9,68.1 118.58,67.78 118.58,65.88 117,64.29 113.19,64.29 111.28,66.2 105.89,66.2 104.93,65.25 101.76,65.25 99.29,62.78 U9.15
  pour Top (rank 2, no thermals): 119.54,117.63 118.74,117.63 118.74,119.06 119.54,119.06
N$64
  Top 0.254: R35.1 119.86,64.93 118.58,63.66 112.87,63.66 110.97,65.56 106.2,65.56 105.25,64.61 102.08,64.61 99.75,62.28 U9.14
N$65
  Top 0.254: U9.23 93.3,69.26 90.33,72.23 90.33,74.34 R28.1
N$66
  Top 0.406: C61.1 122.71,69.65 TCXO1.3
N$67
  Top 0.254: R29.1 89.38,77.63 88.74,76.99 88.74,72.87 92.8,68.81 U9.24
N$68
  Top 0.406: C78.1 92.55,80.76 TCXO2.3
N$69
  Top 0.254: U9.42 83.78,58.78 82.71,59.85 82.07,59.85 82.07,59.14 U10.1
N$70
  Top 0.305: R14.2 79.62,116.16 C39.1
  Top 0.406: R14.2 75.61,116.16 75.41,116.36 75.41,117.61 U4.3
N$71
  Top 0.254: 104.5,124.19 C21.1
  Top 0.61: 105.41,122.39 C26.1 105.89,122.6 | 105.41,122.39 L13.2 | C22.1 104.5,124.19 104.46,124.14 105.25,124.14 105.25,122.55 105.41,122.39
N$72
  pour Top (no thermals): 95.21,121.37 95.21,120.41 95.37,120.25 95.37,120.25 95.69,119.93 95.69,118.66 94.57,118.66 94.41,118.82 94.41,120.25 94.57,120.41 94.57,121.37 94.73,121.37 94.73,120.73 95.05,120.73 95.05,121.37
N$73
  pour Top (no thermals): 94.3,122.08 94.3,122.24 92.87,122.24 91.44,122.55 90.33,122.55 90.33,121.76 91.44,121.76 92.87,122.08
N$74
  Top 0.61: R41.1 C90.2
N$75
  pour Top (no thermals): 96.52,121.6 96.52,123.19 97,123.19 97.31,122.87 103.5,122.87 103.5,121.92 97.31,121.92 97,121.6
N$76
  Top 0.406: JP1.2 76.99,118.58 76.67,118.9 76.67,119.22 76.36,119.54 U4.1
N$77
  Top 0.254: U9.33 84.35,63.28 X6.1
N$78
  Top 0.254: U9.32 88.8,66.14 88.42,66.52 85.56,66.52 X4.1
N$79
  Top 0.61: L9.1 95.09,117 | C14.1 95.09,116.68
  Top 1: L7.P$2 95.09,116.68 95.09,117
N$80
  Top 0.28: U3.1 93.49,123.14 arc-45 93.31,123.22
  Top 0.305: 93.31,123.22 92.39,123.98 R5.1
OBC_-FAULT  (via drill 0.3)
  Top 0.254: R33.2 110.76,63.86 110.33,64.29 v107.79,64.29
  Top 0.406: R33.2 110.76,61.87 110.65,61.75 R36.1
  Bottom 0.254: 84.93,57.94 89.69,57.94 91.28,59.53 96.04,59.53 97.63,61.12 100.49,61.12 102.71,63.34 107.16,63.34 107.79,63.98 v107.79,64.29
  Bottom 0.305: 84.93,57.94 81.44,57.94 54.77,85.41 54.77,96.68 53.81,97.63 51.59,97.63 50.64,98.9 X1.34
OBC_-FAULT_IN
  Top 0.254: U9.12 100.65,61.28 102.71,63.34 109.06,63.34 R33.1
OBC_OFF
  Bottom 0.254: R37.2 81.6,56.51
  Bottom 0.305: 81.6,56.51 54.13,84.93 51.91,84.93 51.91,87.47 50.65,88.73 | X1.26 50.65,88.73 | 50.65,88.73 50.64,88.74
OBC_OFF_OUT  (via drill 0.3)
  Top 0.254: U9.2 91.84,56.28 v91.28,56.67
  Bottom 0.254: R37.1 91.12,56.51 v91.28,56.67
PA_-FAULT
  Top 0.254: R12.2 66.36,89.69 66.2,89.85 U5.10 66.2,91.44
PA_BIAS  (via drill 0.3)
  Top 0.254: U9.5 97.15,57.78 v96.36,56.99 | v72.39,64.45 74.77,66.83 v74.77,72.23 | v73.5,74.77 73.5,99.85 79.53,105.89 79.53,111.92 79.85,112.23
  Top 0.305: 79.85,112.23 79.85,113.19 R13.1 R16.2 79.01,114.23 R14.1
  Bottom 0.254: v72.39,64.45 80.8,55.72 81.44,55.09 91.91,55.09 93.82,56.99 v96.36,56.99 | v74.77,72.23 74.77,73.5 v73.5,74.77
PA_ON  (via drill 0.3)
  Top 0.254: U9.40 v83.73,59.78 | R10.2 65.88,76.08 65.88,74.77 65.86,74.31 65.88,74.29 65.88,73.5 66.99,72.39 v68.9,72.39
  Top 0.305: R7.1 66.08,74.97 65.88,74.77
  Bottom 0.254: v68.9,72.39 80.8,59.85 83.67,59.85 v83.74,59.78 | v83.73,59.78 v83.74,59.78 | v83.74,59.78 83.77,59.74
TX_ON  (via drill 0.3)
  Top 0.254: 104.61,96.04 104.61,73.5 v101.76,70.64 | v96.68,63.66 92.87,63.66 90.01,60.8 89.38,60.8 89.35,60.78 U9.38
  Top 0.305: 104.61,96.04 108.42,99.85 R2.1 R1.2
  Bottom 0.254: v101.76,70.64 101.76,68.74 v96.68,63.66
VAPC  (via drill 0.4)
  Top 0.254: C28.2 v94.3,125.09 94.66,124.73 U3.16 | U3.15 95.16,125.48 96.04,126.36
  Top 0.305: 96.04,126.52 95.93,126.41 C32.2 95.93,126.36 96.04,126.36
  Top 0.61: C28.2 C32.2
  Bottom 0.406: v94.3,125.09 94.3,125.89 92.87,126.05 82.55,126.05 80.48,123.98 80.48,121.44 JP1.1
VBAT
  Top 0.254: X1.11 53.18,70.96 50.64,70.96 X1.12
  pour Top (no thermals): 53.81,70.33 50.01,70.33 50.01,71.59 53.81,71.59
VBUS
  pour Top (no thermals): 45.88,69.37 54.45,69.37 54.59,69.51 57.31,72.38 57.31,90.17 62.23,90.17 62.23,92.23 62.55,92.23 62.55,90.17 64.13,90.17 64.13,92.23 64.93,92.23 64.93,85.41 64.13,85.41 64.13,87.31 62.55,87.31 62.55,79.85 64.29,79.85 64.29,65.25 62.39,65.25 62.39,74.45 58.58,74.45 58.58,68.9 54.75,65.08 45.88,65.08
VCCRF  (via drill 0.3, 0.6, 1)
  Top 0.254: U8.32 86.95,82.59 87.47,82.07 | 94.77,83.66 93.98,84.3 93.98,84.93 93.19,85.72 92.69,86.22 U8.40 | L14.2 89.17,93.3 87.95,92.08 U8.3 | C79.1 91.8,87.99 91.53,87.72 U8.43 | U8.9 84.93,90.99 84.93,93.19 82.71,95.41 v81.12,95.41 C64.1 | 87.47,82.07 v86.52,82.07 | v91.91,74.45 91.91,76.67 92.55,76.04 92.55,76.4 TCXO2.4 | C67.1 87.47,82.07 | U7.32 117.43,69.17 116.68,68.42 C51.1 v116.68,69.69 | U7.3 118.43,83.07 C52.1 | U7.43 121.69,76.29 123.35,77.94 129.38,77.94 | 129.38,77.94 129.5,77.94 | U7.40 123.33,74.79 124.3,73.82 125.14,73.82 | U7.9 115.43,81.73 115.09,82.07 112.23,82.07 111.28,83.03 v109.85,83.03 C48.1 | 100.17,95.09 100.01,94.93 | C56.1 129.58,78.15 129.38,77.94 | C74.1 95.72,83.66
  Top 0.406: C59.1 123.23,64.77 TCXO1.4 122.52,65.37 | C76.1 93.07,75.88 TCXO2.4 | C79.1 100.92,87.99 101.44,87.47 | 94.77,83.66 95.72,83.66 95.72,83.34 97,82.07 101.44,82.07 | 129.5,77.94 129.5,77.19 130.33,76.36 131.28,76.36 | 131.28,72.23 125.57,72.23 125.14,72.66 125.14,73.82 C63.1 | U1.6 121.37,96.11 C7.1 | R3.2 106.84,99.53 101.12,93.82
  Top 0.61: C76.1 93.07,71.71 93.82,70.96 97.63,70.96 v98.9,72.23 | C70.1 C69.1 C34.1 C29.1 89.58,95.61 89.06,95.09 89.06,94.25 L14.2 | C7.1 124.3,95.72 C6.P$1 124.34,95.72 126.52,95.72
  Top 0.813: C70.1 99.33,95.61 99.38,95.57 | C52.1 C53.1 128.95,84.5 | 128.95,84.5 129.5,84.5 131.28,82.71 131.28,76.36 131.28,72.23 131.28,64.61 128.75,62.07 118.9,62.07 | 128.95,84.5 128.95,93.3 126.52,95.72
  Top 1: L16.2 77.94,79.73
  Top 1.016: 77.94,79.73 C93.1 80.69,79.73 v80.8,79.85 | v98.9,72.23 101.44,74.77 101.44,82.07 101.44,87.47 101.44,93.5 101.12,93.82 100.01,94.93 99.38,95.57 99.22,95.72 | 122.52,65.37 119.22,62.07 118.9,62.07 v114.14,62.07
  Bottom 0.254: v86.52,82.07 86.52,81.12 91.91,75.72 v91.91,74.45 | 114.14,63.34 115.41,63.34 116.68,64.61 v116.68,69.69 114.3,69.69 112.39,71.59 112.39,79.22 109.85,81.75 v109.85,83.03 | v81.12,95.41 82.07,95.41 82.39,95.09 82.39,79.85 81.12,79.85
  Bottom 1.016: v80.8,79.85 81.12,79.85 90.01,70.96 97.63,70.96 v98.9,72.23 105.25,72.23 114.14,64.61 114.14,63.34 v114.14,62.07
VCOMMS_PA  (via drill 0.3)
  Top 0.254: U3.14 95.66,124.39 97.15,125.89 97.15,130.17 97,130.33
  Top 0.305: 94.97,104.75 94.91,107.29 94.77,104.93 94.52,105.57 C11.P$1 | R16.1 76.36,113.19 76.04,112.87
  Top 0.406: U4.5 77.97,120.89 C47.1
  Top 0.61: U6.7 69.81,110.44 R9.1 73.82,111.4 C38.1 | C13.1 C12.1 94.97,104.75 | C47.1 77.74,122.6 74.77,125.57
  Top 0.8: C27.1 93.23,130.22 93.19,130.17 C31.1 C35.1 | C35.1 C36.2 87.04,130.22 | R5.2 92.39,129.42 C35.1
  Top 0.813: C11.P$1 v92.55,108.11 | v76.67,108.11 76.67,112.23 76.04,112.87 69.69,112.87
  Top 1: C13.1 94.97,111.4 94.77,111.6 95.08,111.6 L7.P$1
  Bottom 0.813: v92.55,108.11 v76.67,108.11
  pour Top (no thermals): 71.12,108.74 71.12,118.58 79.06,126.52 82.39,126.52 82.39,126.68 71.91,126.68 67.94,122.87 67.94,108.74
  pour Top (no thermals): 70.8,125.73 90.96,125.73 90.96,130.65 75.56,130.65
  pour Top (no thermals): 101.92,133.03 101.92,124.62 98.42,124.62 98.42,129.54 90.01,129.54 90.01,130.65 98.42,130.65 98.42,133.03
VSOLAR
  Top 0.254: X1.6 50.64,63.34 53.18,63.34 X1.5 53.2,63.2 53.2,60.8 | 53.2,60.8 50.8,60.8 X1.4 | 53.2,60.8 X1.3
  pour Top (no thermals): 53.81,60.16 53.81,64.29 50.01,64.29 50.01,60.16